# Altium PCB CT310高端控制盒核心板电路V1.3.PcbDoc (part 1 of 10)
Units mil, origin at the board's own origin, x right, y up, seen from the top; angles counter-clockwise.
Board outline 3735.76 x 4625 mil, 2 copper layers (TOP, BOTTOM), stack 10.4 mil thick; 198 components, 362 nets, 1085 pads, 352 vias.
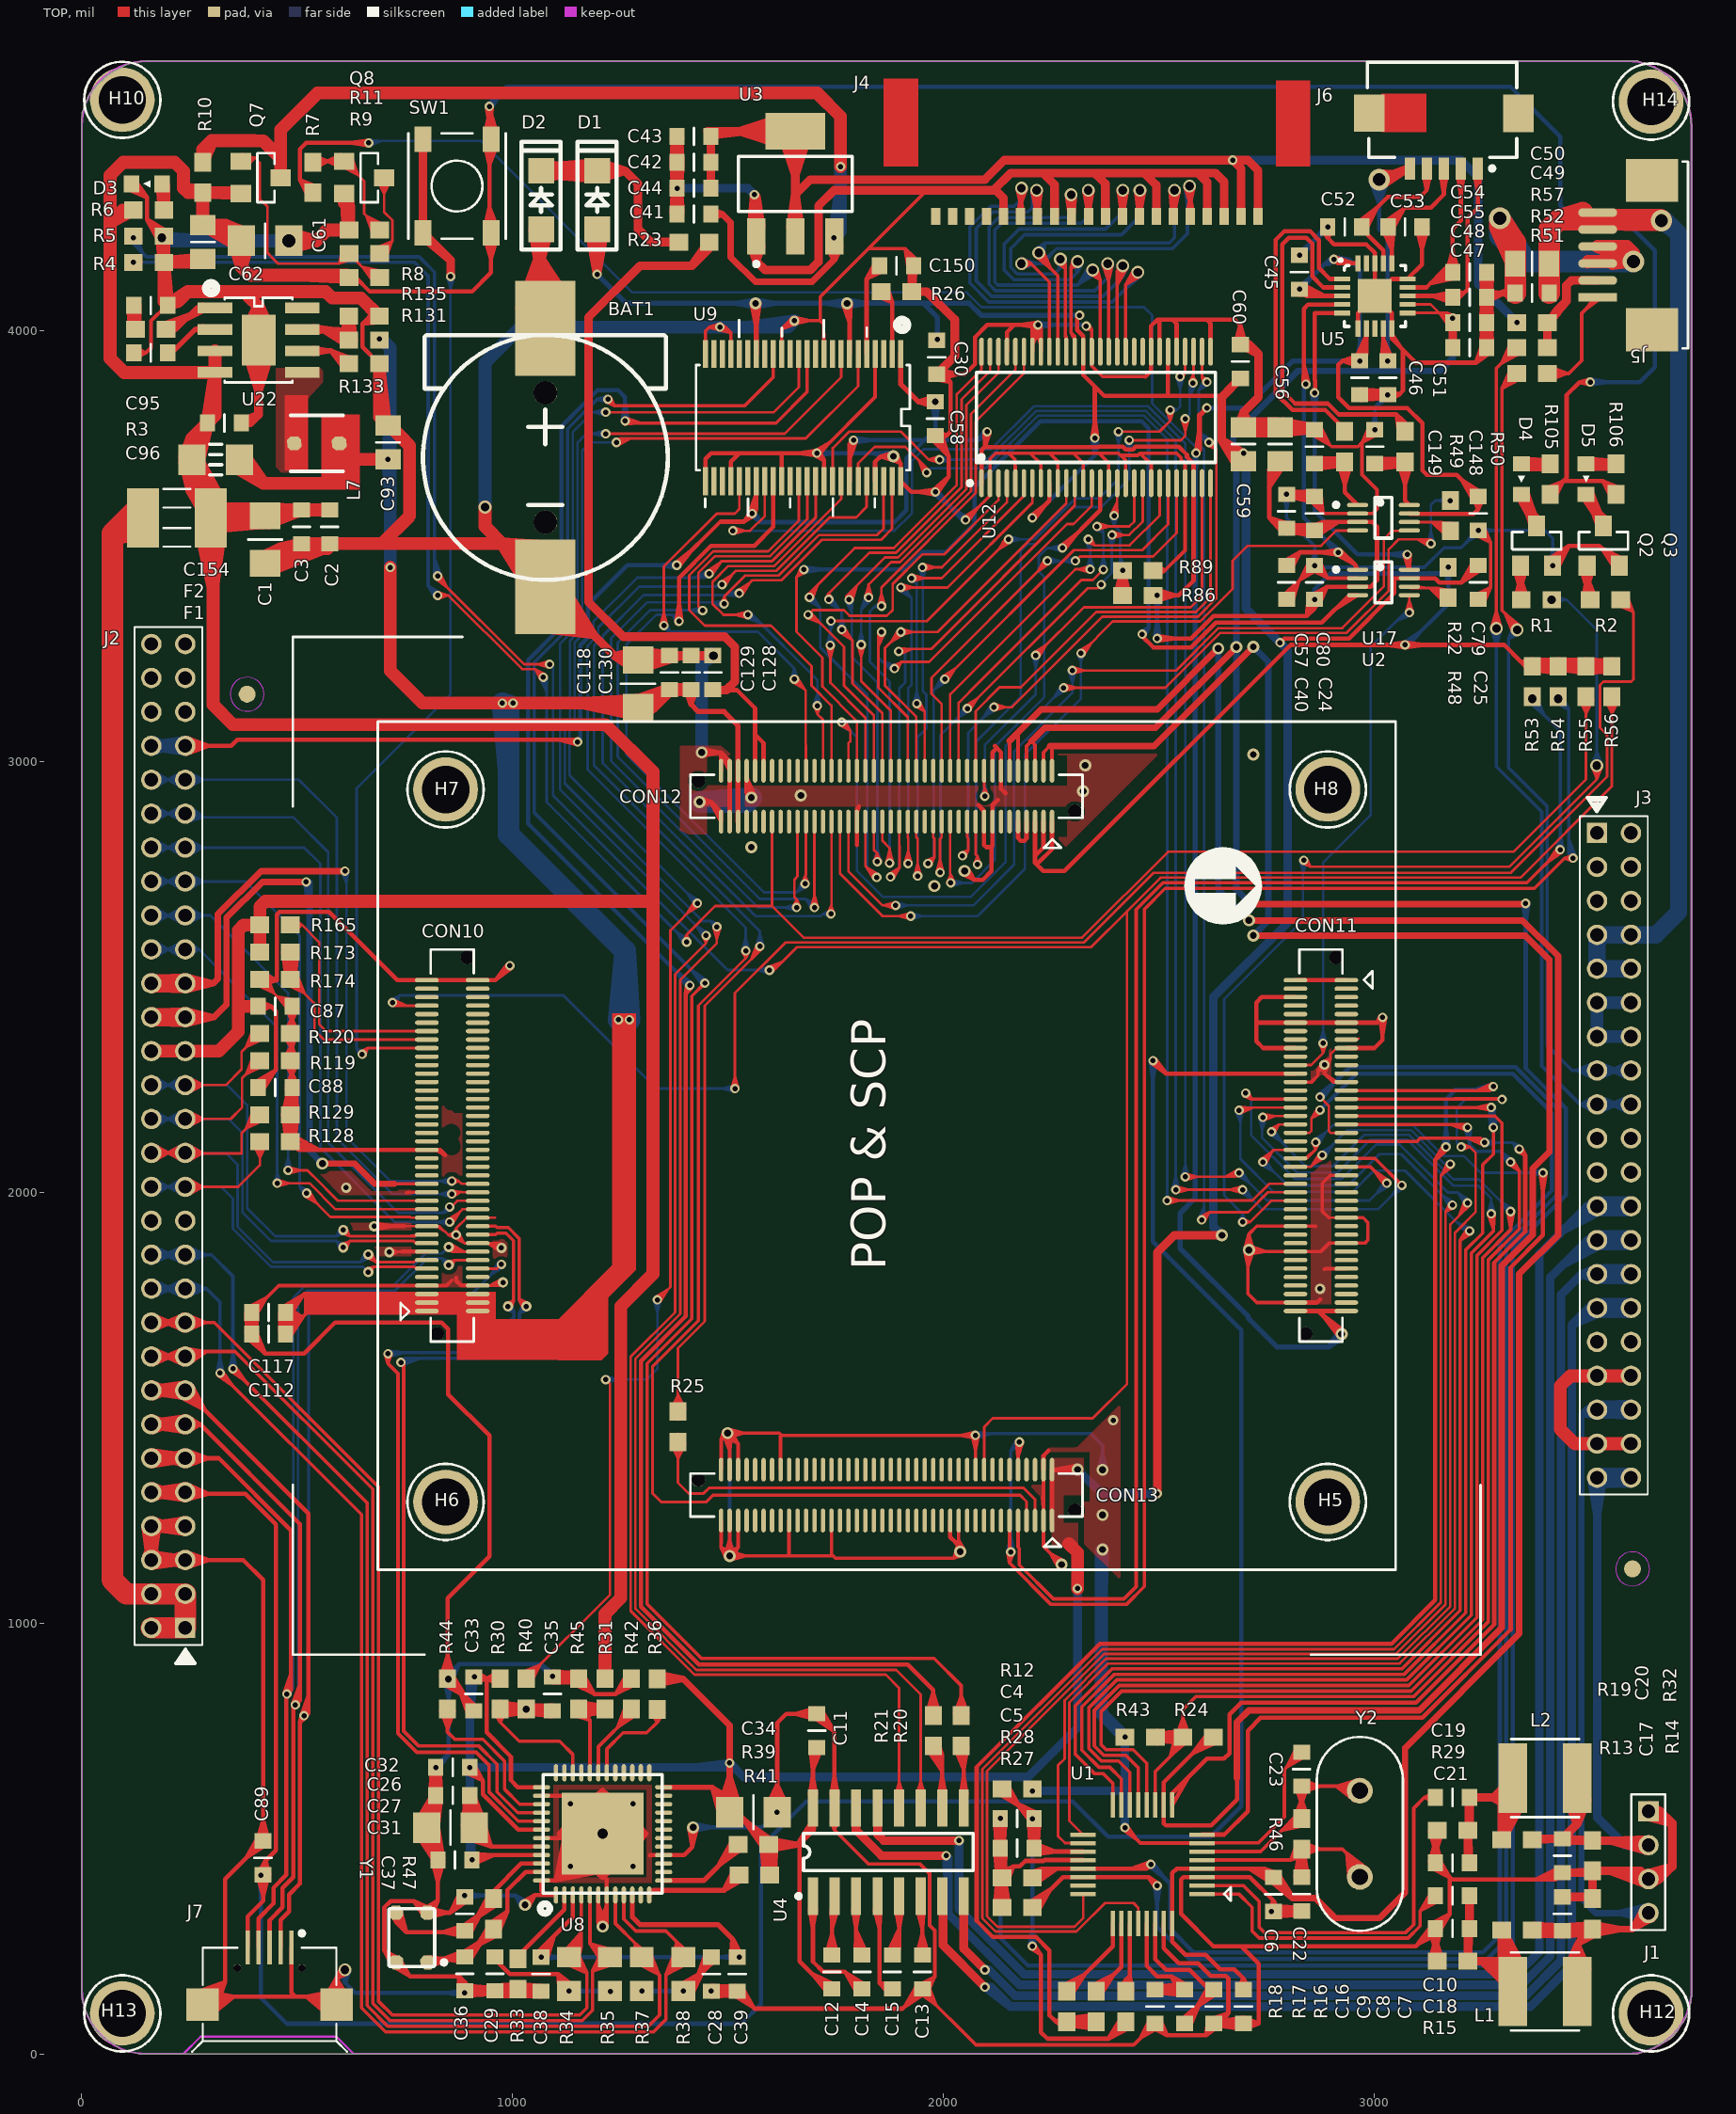
[diagram p0: TOP view]
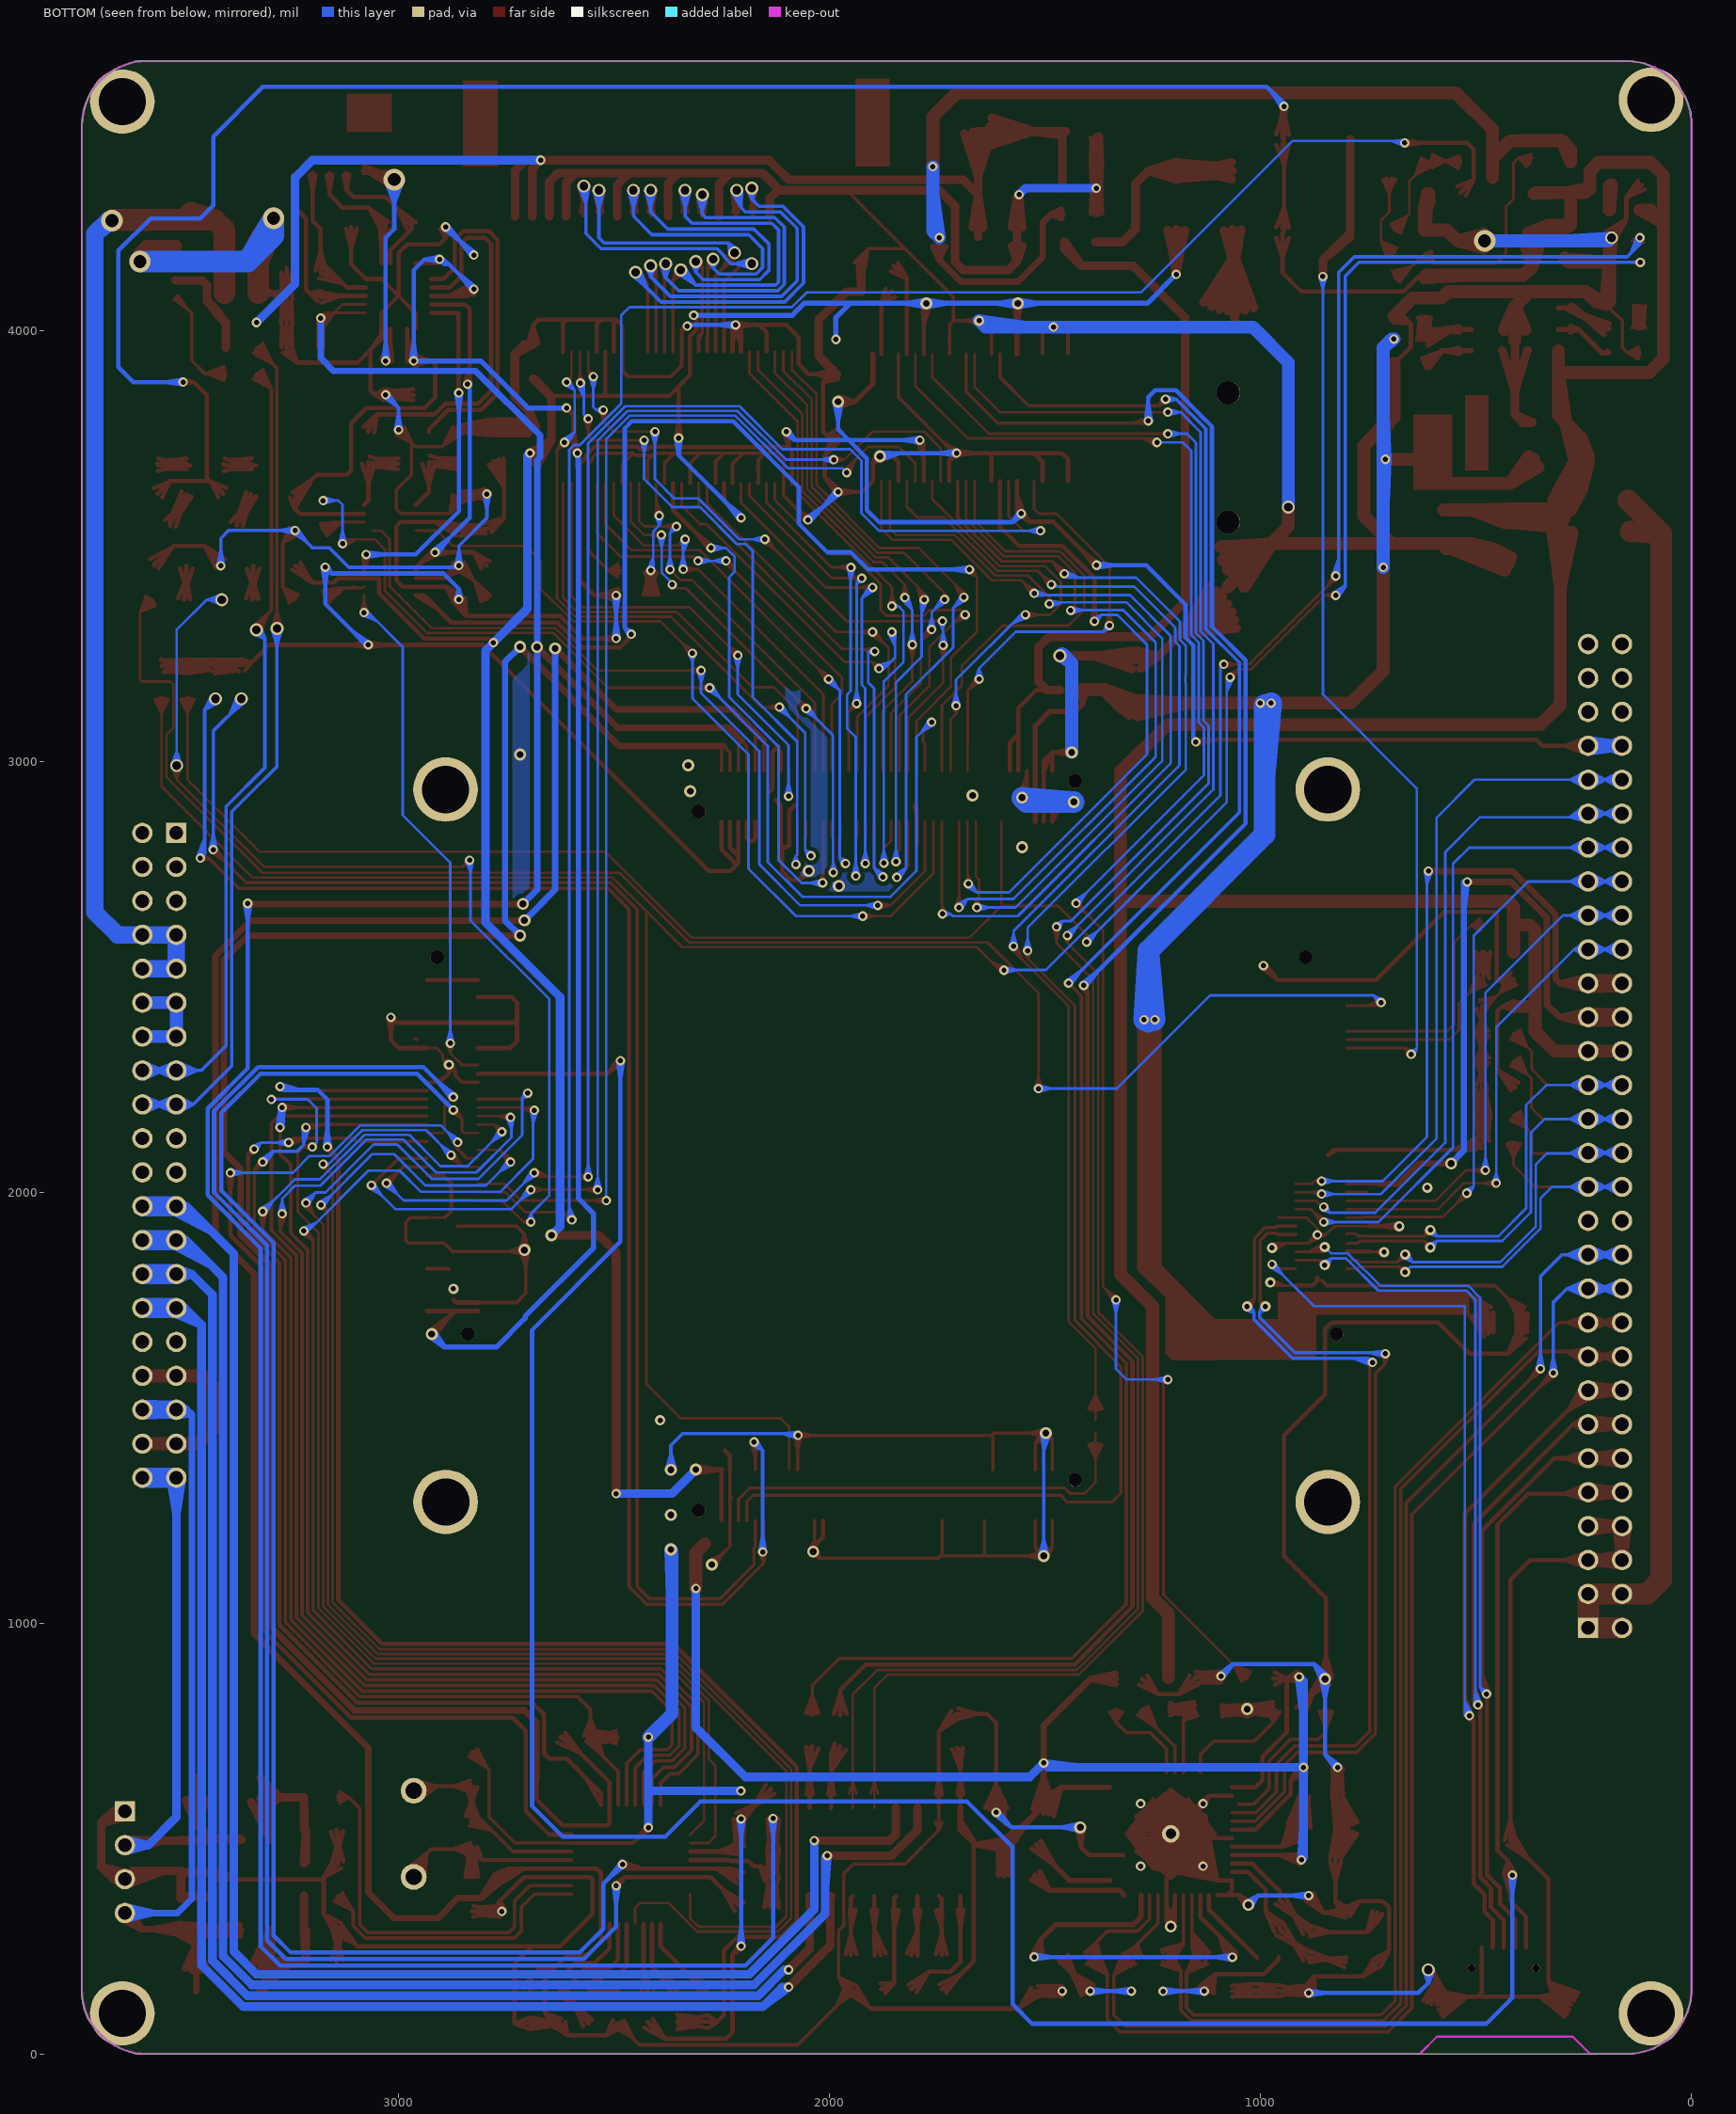
[diagram p1: BOTTOM view, seen from below]
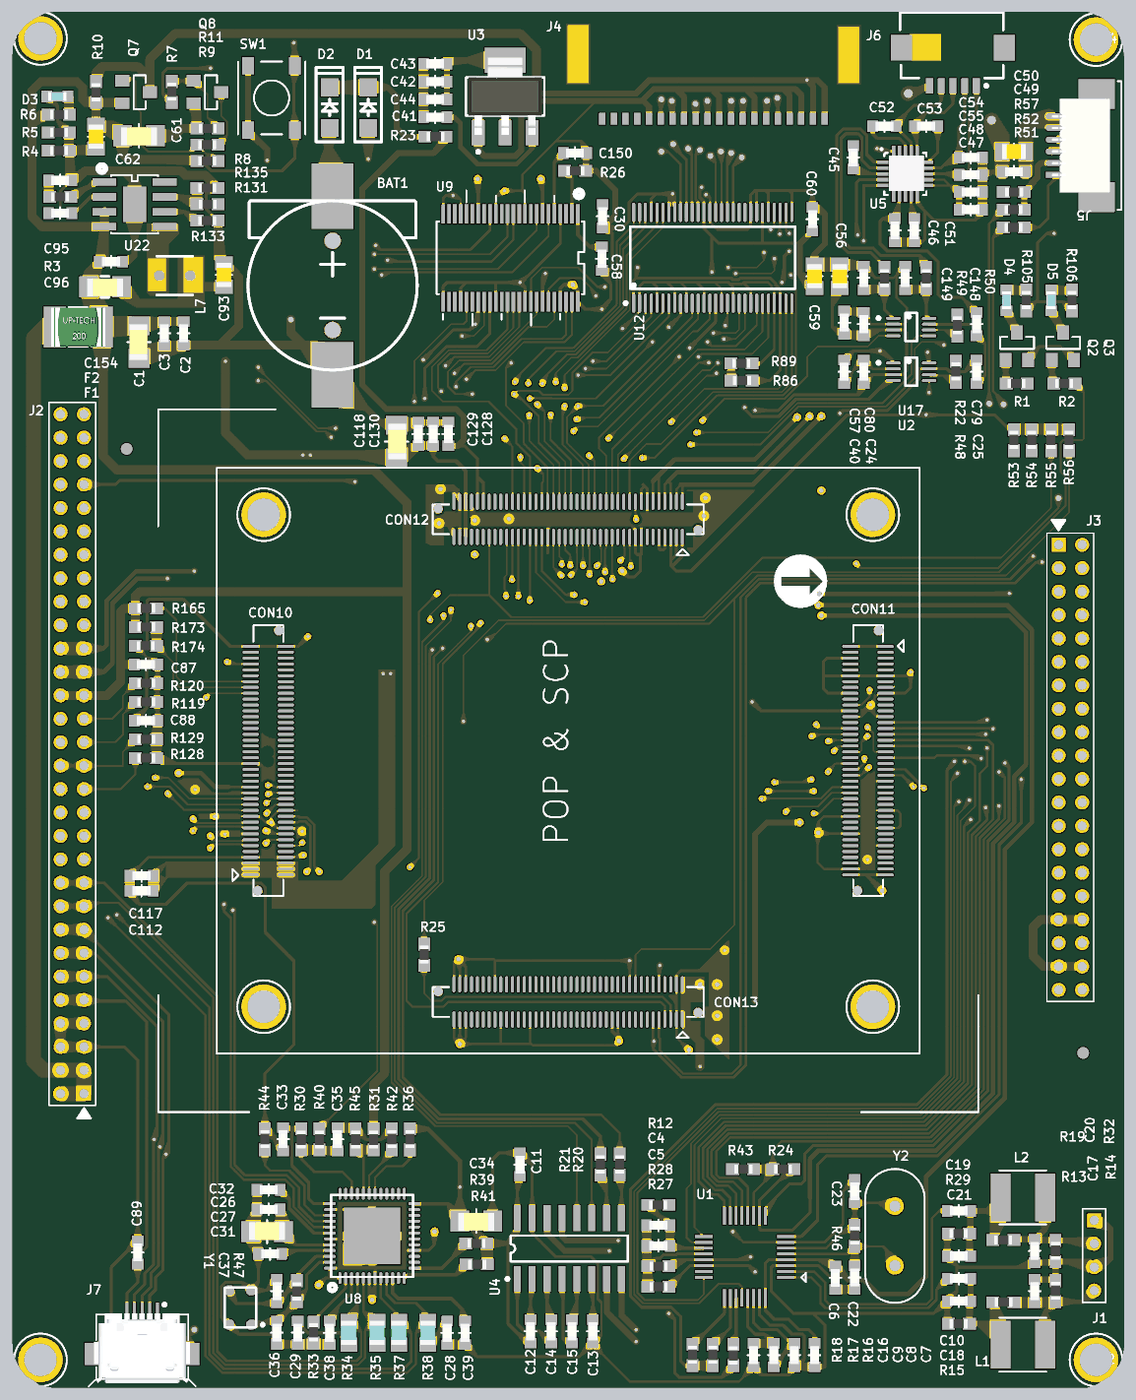
[diagram p11: 3D render of the assembled board from above, using the file's embedded part models]

## Layer stack, top to bottom
TOP: signal copper 1.2
Dielectric: core 8, FR-4, Dk 4.5
BOTTOM: signal copper 1.2

## Board outline
0,4479.24 0,150.76 0.76,125 10.76,95 25.76,65 45.76,40 70.76,25 90.76,10 135.76,0 160.76,0 3590.76,0 3610.76,0 3640.76,10 3665.76,25 3690.76,40 3705.76,60 3720.76,80 3730.76,105 3735.76,135 3735.76,145 3735.76,4475 3730.76,4510 3720.76,4540 3710.76,4560 3695.76,4575 3680.76,4590 3660.76,4605 3635.76,4615 3610.76,4625 3585.76,4625 145.76,4625 110.76,4620 90.76,4610 70.76,4600 50.76,4585 35.76,4570 15.76,4545 0.76,4505 0,4479.24

## Design rules (kind name [scope] priority, off if disabled: settings)
Clearance [All] p1: gap=5
HoleSize [All] p1: absolutevalues=TRUE maxlimit=200 minlimit=1 maxpercent=80.000 minpercent=20.000
MinimumSolderMaskSliver [All] p1: minsoldermaskwidth=8
PlaneConnect [All] p1: planeconnectstyle=Direct reliefexpansion=20 reliefentries=4 reliefconductorwidth=10 reliefairgap=10
PolygonConnect [All] p1: connectstyle=Direct reliefconductorwidth=10 reliefentries=4 polygonreliefangle="90 Angle" airgapwidth=10
RoutingVias [All] p1: holewidth=28 width=50 viastyle="Through Hole" minholewidth=10 minwidth=10 maxholewidth=50 maxwidth=100
SolderMaskExpansion [All] p1: expansion=4
Width [All] p1: maxlimit=100 minlimit=6 preferedwidth=10 minimp=60.000000 maximp=60.000000 favimp=60.000000
25 further rules are at their usual default settings.

## Classes and differential pairs
component class P02-DC_JACK: BAT1 C1 C2 C3 D1 D2 D3 F1 H5 H6 H7 H8 H10 H12 H13 H14 R6 R23 SW1
component class P03-UARTs_KEY: C11 C12 C13 C14 C15 D4 D5 Q2 Q3 R1 R2 R20 R21 R105 R106 U4
component class P04-NET: C26 C27 C28 C29 C30 C31 C32 C33 C34 C35 C36 C37 C38 C39 C58 C150 R25 R26 R30 R31 R33 R34 R35 R36 R37 R38 R39 R40 R41 R42 R44 R45 R47 U8 U9 Y1
component class P07-LCD: C24 C25 C40 C41 C42 C43 C44 C45 C46 C47 C48 C49 C50 C51 C52 C53 C54 C55 C56 C57 C59 C60 C61 C62 C79 C80 C148 C149 J4 J6 Q7 Q8 R7 R8 R9 R10 R11 R22 R48 R49 R50 R51 R52 R57 R86 R89 U2 U3 U5 U12 U17
component class P09-USB_JTAG: C87 C88 C89 J7 R119 R120 R128 R129
component class "P11-CAMERA AVIN": C4 C5 C6 C7 C8 C9 C10 C16 C17 C18 C19 C20 C21 C22 C23 J1 L1 L2 R12 R13 R14 R15 R16 R17 R18 R19 R24 R27 R28 R29 R32 R43 R46 U1 Y2
component class P15-EXP_IO: C93 C95 C96 C112 C117 C118 C128 C129 C130 C154 CON10 CON11 con12 CON13 F2 L7 R3 R4 R5 R53 R54 R55 R56 R131 R133 R135 R165 R173 R174 U22
net class LCD_VD[0..23]: LCD_VD0 LCD_VD1 LCD_VD2 LCD_VD3 LCD_VD4 LCD_VD5 LCD_VD6 LCD_VD7 LCD_VD8 LCD_VD9 LCD_VD10 LCD_VD11 LCD_VD12 LCD_VD13 LCD_VD14 LCD_VD15 LCD_VD16 LCD_VD17 LCD_VD18 LCD_VD19 LCD_VD20 LCD_VD21 LCD_VD22 LCD_VD23
net class XM0ADDR[0..7]: XM0ADDR0 XM0ADDR1 XM0ADDR2 XM0ADDR3 XM0ADDR4 XM0ADDR5 XM0ADDR6 XM0ADDR7
net class XM0DATA[0..15]: XM0DATA0 XM0DATA1 XM0DATA2 XM0DATA3 XM0DATA4 XM0DATA5 XM0DATA6 XM0DATA7 XM0DATA8 XM0DATA9 XM0DATA10 XM0DATA11 XM0DATA12 XM0DATA13 XM0DATA14 XM0DATA15
component class P16-Connector: J2 J3

## Components (designator, comment, footprint, x,y, rotation, side; value= is the part's Value field where it differs from the comment)
BAT1 "CR1220" BAT1 1075.76,3705 r90 top
C1 "22uF/10V" C1206-S 425.19,3514.53 r270 top
C2 "0.1uF/10V" C0603-S 575.19,3544.06 r270 top
C3 "10uF/10V" C0603-S 510.19,3544.06 r270 top
C4 "2.2uF" C0603-S 2170.76,546.25 r180 top
C5 "0.1uF" C0603-S 2170.76,477.5 r180 top
C6 "2.2uF" C0603-S 2765.76,370 r90 top
C7 "0.1uF" C0603-S 2695.76,110 r90 top
C8 "1uF" C0603-S 2627.43,110 r90 top
C9 "1uF" C0603-S 2559.09,110 r270 top
C10 "0.1uF" C0603-S 3180.76,367 r180 top
C11 "0.1uF" C0603-S 1705.76,750 r90 top
C12 "0.1uF" C0603-S 1740.76,190 r90 top
C13 "0.1uF" C0603-S 1950.76,190 r270 top
C14 "0.1uF" C0603-S 1810.76,190 r270 top
C15 "0.1uF" C0603-S 1880.76,190 r90 top
C16 "1uF" C0603-S 2490.76,110 r90 top
C17 "0.1uF/NC" C0603-S 3435.76,325 r90 top
C18 "0.1uF/NC" C0603-S 3180.76,291 r180 top
C19 "0.1uF" C0603-S 3180.76,595 r180 top
C20 "0.1uF/NC" C0603-S 3435.76,460 r270 top
C21 "0.1uF/NC" C0603-S 3180.76,443 r180 top
C22 "22pF" C0603-s 2830.76,370.63 r270 top
C23 "22pF" C0603-s 2830.76,660.63 r270 top
C24 "0.1uF" C0603-S 2860.76,3415 r90 top
C25 "0.1uF" C0603-S 3240.76,3415 r270 top
C26 "0.1uF" C0603-S 860.76,600 r180 top
C27 "22uF" C1206-S 855.76,525 r180 top
C28 "0.1uF" C0603-S 1460.76,185 r90 top
C29 "0.1uF" C0603-S 958.61,185.57 r90 top
C30 "0.1uF" C0603-S 1983.61,3937.64 r270 top
C31 "0.1uF" C0603-S 865.76,450 r180 top
C32 "0.1uF" C0603-S 860.76,665 r180 top
C33 "0.1uF" C0603-S 909.51,835.57 r270 top
C34 "22uF" C1206-S 1558.61,560.57 r0 top
C35 "0.1uF" C0603-S 1092.19,835.57 r270 top
C36 "22pF" C0603-S 888.61,185.57 r270 top
C37 "22pF" C0603-S 888.61,325 r90 top
C38 "0.1uF" C0603-S 1065.76,185 r270 top
C39 "0.1uF" C0603-S 1520.76,185 r270 top
C40 "0.1uF/NC" C0603-S 2795.76,3415 r270 top
C41 "10uF" C0603-s 1420.76,4270 r0 top
C42 "10uF" C0603-s 1420.76,4390 r0 top
C43 "0.1uF" C0603-s 1420.76,4450 r0 top
C44 "0.1uF" C0603-s 1420.76,4330 r0 top
C45 "0.1uF" C0603-S 2825.76,4135 r270 top
C46 "0.1uF" C0603-S 2965.76,3890 r90 top
C47 "0.1uF" C0603-S 3220.76,3960 r180 top
C48 "0.1uF" C0603-S 3220.76,4018.33 r180 top
C49 "0.1uF" C0603-s 3365.76,4086.67 r0 top
C50 "22uF" C0805-s 3365.76,4154.84 r0 top
C51 "1nF" C0603-S 3030.76,3890 r90 top
C52 "1nF" C0603-S 2930.76,4240 r0 top
C53 "1nF" C0603-S 3070.76,4240 r180 top
C54 "1nF" C0603-S 3220.76,4135 r180 top
C55 "1nF" C0603-S 3220.76,4076.67 r180 top
C56 "10uF" C0805-S 2780.76,3735.91 r90 top
C57 "0.1uF" C0603-S 2795.76,3580 r90 top
C58 "0.1uF" C0603-S 1980.76,3795 r270 top
C59 "10uF" C0805-S 2695.76,3735.91 r90 top
C60 "0.1uF" C0603-S 2688.61,3927.64 r90 top
C61 "47uF/16v" C1206-S 425.19,4207.85 r0 top
C62 "10uF" C0805-S 280.76,4205 r270 top
C79 "0.1uF" C0603-S 3240.76,3575 r270 top
C80 "0.1uF" C0603-S 2860.76,3575 r90 top
C87 "1uF/10V" C0603-S 448.61,2431.21 r0 top
C88 "1uF/10V" C0603-S 448.61,2242.43 r0 top
C89 "4.7uF" C0603-S 420.76,455 r270 top
C93 "22uF" C0805-S 710.76,3740 r90 top
C95 "560pF" C0603-S 160.19,4057.85 r0 top
C96 "10nF" C0603-S 160.19,3947.85 r180 top
C112 "0.1uF/10V" C0603-S 433.61,1670.57 r180 top
C117 "0.1uF/10V" C0603-S 433.61,1720.57 r180 top
C118 "22uF/10V" C1206-S 1290.76,3180 r90 top
C128 "1uF/10V" C0603-S 1464.61,3205.89 r90 top
C129 "0.1uF/10V" C0603-S 1414.11,3205.89 r90 top
C130 "0.1uF/10V" C0603-S 1363.61,3205.89 r90 top
C148 "0.1uF/NC" C0603-S 3000.76,3730 r90 top
C149 "0.1uF/NC" C0603-S 2860.76,3730 r90 top
C150 "0.1uF/NC" C0603-S 1890.76,4150 r0 top
C154 "10uF" C0603-S 330.76,3785 r0 top
CON10 "CON40X2_0_8MM" CON2X40-0_5MM-BB 859.72,2107.89 r90 top
CON11 "CON40X2_0_8MM" CON2X40-0_5MM-BB 2875.46,2107.89 r270 top
CON12 "CON40X2_0_8MM" CON2X40-0_5MM-BB 1867.59,2918.92 r180 top
CON13 "CON40X2_0_8MM" CON2X40-0_5MM-BB 1867.59,1296.87 r180 top
D1 "IN4148" D1206 1195.76,4305 r270 top
D2 "IN4148" D1206 1065.76,4305 r270 top
D3 "LED-Red (SMD 2012)" LED0603 150.76,4340 r180 top
D4 "LED-Red (SMD 2012)" LED0603 3340.76,3655 r270 top
D5 "LED-Red (SMD 2012)" LED0603 3490.76,3655 r270 top
F1 "500ma" F1812 220.76,3565 r0 top
F2 "0R/NC" F1206 310.76,3700 r0 top
H5 "TP_P0_0.8_D0" HOLE2_7 2891.52,1280.91 r0 top
H6 "TP_P0_0.8_D0" HOLE2_7 844.26,1280.91 r0 top
H7 "TP_P0_0.8_D0" HOLE2_7 844.26,2934.45 r0 top
H8 "TP_P0_0.8_D0" HOLE2_7 2891.62,2934.45 r0 top
H10 "TP_P0_0.8_D0" HOLE2_7 93.95,4535 r0 top
H12 "TP_P0_0.8_D0" HOLE2_7 3641.81,93.95 r0 top
H13 "TP_P0_0.8_D0" HOLE2_7 93.95,93.95 r0 top
H14 "TP_P0_0.8_D0" HOLE2_7 3641.81,4531.05 r0 top
J1 "HEADER1X4" HD1X4-2.00 3635.76,445 r270 top
J2 "HEADER 30X2" HD2X30-2.00 200.76,2130.37 r90 top
J3 "HEADER 2X20" HD2X20-2.00 3555.76,2085.42 r270 top
J4 "DF19G-20P-1H" DF19G-20P-1H 2355.76,4265 r180 top
J5 "ZH1X6WT-1.5" sm06b-srss-tb 3580.76,4175 r90 top
J6 "HEADER1X5" FFC/SM1.0-5 3160.76,4440 r180 top
J7 "ZX62RD-AB-5P8" MICRO-USB 435.76,180.55 r180 top
L1 "3.3uH/NC" L4X4-S 3395.76,145 r180 top
L2 "3.3uH/NC" L4X4-S 3395.76,640 r180 top
L7 "2.2uH" L3X3MM 545.19,3737.85 r0 top
Q2 "L9014" SOT-23 3375.76,3500 r180 top
Q3 "L9014" SOT-23 3530.76,3500 r180 top
Q7 "AO3415A" SOT-23 415.44,4355 r90 top
Q8 "8050" SOT-23 655.44,4355 r90 top
R1 "1K" R0603-S 3375.76,3375 r0 top
R2 "1K" R0603-S 3535.76,3375 r0 top
R3 "33K" R0603-S 160.19,4002.85 r0 top
R4 "10K" R0603-S 155.19,4157.85 r180 top
R5 "10K" R0603-S 155.19,4218.57 r180 top
R6 "1K" R0603-S 155.19,4279.28 r180 top
R7 "1K/NC" R0603-S 535.76,4355 r270 top
R8 "100K" R0603-S 655.44,4122.85 r0 top
R9 "22R/NC" R0603-S 655.44,4177.85 r0 top
R10 "0R" R0603-S 280.76,4355 r90 top
R11 "10K/NC" R0603-S 655.44,4232.85 r180 top
R12 "0R" R0603-S 2170.76,615 r0 top
R13 "37.4R" R0603-S 3330.76,287.6 r180 top
R14 "37.4R" R0603-S 3505.76,325 r270 top
R15 "75R/NC" R0603-S 3180.76,215 r0 top
R16 "10k" R0603-S 2422.43,110 r90 top
R17 "0R/NC" R0603-S 2354.09,110 r270 top
R18 "0R" R0603-S 2285.76,110 r270 top
R19 "37.4R" R0603-S 3330.76,497.4 r0 top
R20 "0R" R0603-S 2040.76,750 r270 top
R21 "0R" R0603-S 1975.76,750 r270 top
R22 "0R" R0603-S 3175.76,3570 r270 top
R23 "0R" R0603-S 1420.76,4205 r180 top
R24 "10k" R0603-S 2590.76,735 r0 top
R25 "0R" R0603-S 1383.61,1455.57 r270 top
R26 "10K" R0603-S 1890.76,4090 r180 top
R27 "2.2k/NC" R0603-S 2170.76,340 r180 top
R28 "2.2k/NC" R0603-S 2170.76,408.75 r180 top
R29 "75R/NC" R0603-S 3180.76,519 r0 top
R30 "10K/NC" R0603-S 970.4,835.57 r90 top
R31 "15K" R0603-S 1213.97,835.57 r90 top
R32 "37.4R" R0603-S 3505.76,460 r270 top
R33 "10K" R0603-S 1012.19,185.57 r270 top
R34 "49.9R" R0805-S 1130.76,185 r270 top
R35 "49.9R" R0805-S 1225.76,185 r270 top
R36 "10K" R0603-S 1335.76,835 r270 top
R37 "49.9R" R0805-S 1299.09,185 r270 top
R38 "49.9R" R0805-S 1395.76,185 r270 top
R39 "10K" R0603-S 1558.61,485.57 r180 top
R40 "0R" R0603-S 1031.29,835.57 r90 top
R41 "10K" R0603-S 1560.76,415 r180 top
R42 "10K" R0603-S 1274.87,835.57 r270 top
R43 "NC" R0603-S 2455.76,735 r180 top
R44 "10K" R0603-S 848.61,835.57 r270 top
R45 "47K" R0603-S 1153.08,835.57 r90 top
R46 "1M" R0603-S 2830.76,510.63 r270 top
R47 "1M" R0603-S 955.76,325 r90 top
R48 "10K" R0603-S 3170.76,3415 r270 top
R49 "0R" R0603-S 2930.76,3730 r90 top
R50 "0R" R0603-S 3070.76,3730 r90 top
R51 "NC" R0603-S 3365.76,3900 r0 top
R52 "NC" R0603-S 3365.76,3960 r0 top
R53 "0R/NC" R0603-S 3365.76,3185 r270 top
R54 "0R" R0603-S 3425.76,3185 r270 top
R55 "0R/NC" R0603-S 3490.76,3185 r270 top
R56 "0R" R0603-S 3550.76,3185 r270 top
R57 "0R" R0603-S 3365.76,4018.33 r180 top
R86 "10K" R0603-S 2450.76,3385 r180 top
R89 "NC" R0603-S 2450.76,3442.85 r0 top
R105 "1K" R0603-S 3407.43,3655 r270 top
R106 "1K" R0603-S 3560.76,3655 r270 top
R119 "15K" R0603-S 448.61,2305.36 r180 top
R120 "15K" R0603-S 448.61,2368.29 r180 top
R128 "15K" R0603-S 448.61,2116.57 r180 top
R129 "15K" R0603-S 448.61,2179.5 r180 top
R131 "38K" R0603-S 655.19,3977.85 r180 top
R133 "510K  1%" R0603-S 655.19,3922.85 r0 top
R135 "10K" R0603-S 655.19,4032.85 r0 top
R165 "800K" R0603-S 448.61,2620 r180 top
R173 "800K/NC" R0603-S 448.61,2557.07 r180 top
R174 "0R" R0603-S 448.61,2494.14 r0 top
SW1 "RESET" SW4-SMD 870.76,4335 r90 top
U1 "TVP5150AM1PBSR" PFFQ32 2480.76,440 r90 top
U2 "TXS0102DCU" tssop8 3020.76,3415 r270 top
U3 "REG1117-3.3V" SOT-223 1655.76,4340 r0 top
U4 "MAX3232CSE" SO-16 1870.19,467.85 r0 top
U5 "TSC2004IRTJ" QFN20 3000.76,4080 r0 top
U8 "DM9621ANP" QFN48-050-0707LH 1208.61,510.57 r90 top
U9 "U-74ALVC164245DGG" TSSOP_48 1673.61,3797.64 r180 top
U12 "GM8285C" TSSOP56 2353.61,3797.96 r0 top
U17 "TXS0102DCU" TSSOP8 3020.76,3565 r270 top
U22 "RT8065ZSP" SOIC8-LH 410.19,3977.85 r270 top
Y1 "25MHz" X4-2_5X3_2 765.76,270 r180 top
Y2 "14.31818MHz" CRYSTAL_D200 2965.76,510.37 r270 top

## Footprints (in the part's own frame and the unit in brackets; to place one, negate y for a bottom-side part, rotate by r counter-clockwise, add the part's x,y. Pads: shape width x height; smd on the part's side, far side on the other; paste and mask are expansions set on the pad)
BAT1 [mil] "BAT1"
  rect 220x140 smd: 1(300,0) 2(-300,0)
  round 55 / inner round 60 / far side round 55 hole 55: " "(-150,0) " "(150,0)
  silkscreen extent -284,-284 284,284
C0603-S [mm]
  rect 0.9x1 smd: 1(-1,0) 2(1,0)
  silkscreen extent 0,-0.5 0,0.5, body extent -0.76,-0.39 0.76,0.38, height 0.46
C0603-s [mm]
  rect 0.9x1 smd: 1(-1,0) 2(1,0)
  silkscreen extent 0,-0.5 0,0.5, body extent -0.76,-0.39 0.76,0.38, height 0.46
C0805-s [mm]
  rect 1.2x1.5 smd: 1(-1,0) 2(1,0)
  silkscreen extent 0,-0.69 0,0.69, body extent -1.02,-0.64 1.02,0.64, height 0.61
C0805-S [mm]
  rect 1.2x1.5 smd: 1(-1,0) 2(1,0)
  silkscreen extent 0,-0.69 0,0.69, body extent -1.02,-0.64 1.02,0.64, height 0.61
C1206-S [mm]
  rect 1.6x1.8 smd: 1(-1.4,0) 2(1.4,0)
  silkscreen extent 0,-1 0,1, body extent -1.52,-0.82 1.52,0.71, height 0.61
CON2X40-0_5MM-BB [mil] "CON2X40-0_5MM-BB"
  oval 10x55 smd: 1(-383.86,59.06) 2(-383.86,-59.06) 3(-364.17,59.06) 4(-364.17,-59.06) 5(-344.49,59.06) 6(-344.49,-59.06) 7(-324.8,59.06) 8(-324.8,-59.06) 9(-305.12,59.06) 10(-305.12,-59.06) 11(-285.43,59.06) 12(-285.43,-59.06) 13(-265.75,59.06) 14(-265.75,-59.06) 15(-246.06,59.06) 16(-246.06,-59.06) 17(-226.38,59.06) 18(-226.38,-59.06) 19(-206.69,59.06) 20(-206.69,-59.06) 21(-187.01,59.06) 22(-187.01,-59.06) 23(-167.32,59.06) 24(-167.32,-59.06) 25(-147.64,59.06) 26(-147.64,-59.06) 27(-127.95,59.06) 28(-127.95,-59.06) 29(-108.27,59.06) 30(-108.27,-59.06) 31(-88.58,59.06) 32(-88.58,-59.06) 33(-68.9,59.06) 34(-68.9,-59.06) 35(-49.21,59.06) 36(-49.21,-59.06) 37(-29.53,59.06) 38(-29.53,-59.06) 39(-9.84,59.06) 40(-9.84,-59.06) 41(9.84,59.06) 42(9.84,-59.06) 43(29.53,59.06) 44(29.53,-59.06) 45(49.21,59.06) 46(49.21,-59.06) 47(68.9,59.06) 48(68.9,-59.06) 49(88.58,59.06) 50(88.58,-59.06) 51(108.27,59.06) 52(108.27,-59.06) 53(127.95,59.06) 54(127.95,-59.06) 55(147.64,59.06) 56(147.64,-59.06) 57(167.32,59.06) 58(167.32,-59.06) 59(187.01,59.06) 60(187.01,-59.06) 61(206.69,59.06) 62(206.69,-59.06) 63(226.38,59.06) 64(226.38,-59.06) 65(246.06,59.06) 66(246.06,-59.06) 67(265.75,59.06) 68(265.75,-59.06) 69(285.43,59.06) 70(285.43,-59.06) 71(305.12,59.06) 72(305.12,-59.06) 73(324.8,59.06) 74(324.8,-59.06) 75(344.49,59.06) 76(344.49,-59.06) 77(364.17,59.06) 78(364.17,-59.06) 79(383.86,59.06) 80(383.86,-59.06)
  round 32 / inner round 60 / far side round 32 hole 32: " "(-437.01,35.43) " "(437.01,-35.43)
  silkscreen extent -455,-50 455,120
CRYSTAL_D200 [mil] "CRYSTAL_D200"
  round 60 hole 38: 1(-100.26,0) 2(99.74,0)
  silkscreen extent -225,-100 225,100
D1206 [mil] "D1206"
  rect 60x60 smd: 1(70.49,0) 2(-65.49,0)
  silkscreen extent -132,-45 118,45
DF19G-20P-1H [mm]
  rect 0.55x1 smd: 1(-9.5,0) 2(-8.5,0) 3(-7.5,0) 4(-6.5,0) 5(-5.5,0) 6(-4.5,0) 7(-3.5,0) 8(-2.5,0) 9(-1.5,0) 10(-0.5,0) 11(0.5,0) 12(1.5,0) 13(2.5,0) 14(3.5,0) 15(4.5,0) 16(5.5,0) 17(6.5,0) 18(7.5,0) 19(8.5,0) 20(9.5,0)
  TOP region: 11.171,-5.508 12.271,-5.508 12.271,-3.008 11.171,-3.008
  TOP region: -12.429,-5.508 -11.329,-5.508 -11.329,-3.008 -12.429,-3.008
F1206 [mm]
  rect 1.6x1.8 smd: 1(-1.4,0) 2(1.4,0)
  silkscreen extent -0.35,-0.9 0.35,0.9, body extent -1.52,-0.82 1.52,0.71, height 0.61
F1812 [mm]
  rect 1.9x3.5 smd: 1(-2,0) 2(2,0)
  silkscreen extent -0.8,-1.7 0.8,1.7, body extent -2.29,-1.65 2.31,1.65, height 0.69
FFC/SM1.0-5 [mm] "Connector; FH12 Series; 9 Position; 1.0mm Spaced Bottom Standard Contact"
  rect 1.8x2.2 smd: 0(-4.4,-1.62) 0(4.4,-1.63)
  rect 0.6x1.3 smd: 1(-2,1.63) 2(-1,1.63) 3(0,1.63) 4(1,1.63) 5(2,1.63)
  silkscreen extent -4.3,-4.63 4.51,1.75
HD1X4-2.00 [mm]
  rect 1.2x1.2 hole 0.8: 1(-3,0)
  round 1.2 hole 0.8: 2(-1,0) 3(1,0) 4(3,0)
  silkscreen extent -4,-1.01 4,0.99
HD2X20-2.00 [mm]
  rect 1.2x1.2 hole 0.8: 1(-19,-1)
  round 1.2 hole 0.8: 2(-19,1) 3(-17,-1) 4(-17,1) 5(-15,-1) 6(-15,1) 7(-13,-1) 8(-13,1) 9(-11,-1) 10(-11,1) 11(-9,-1) 12(-9,1) 13(-7,-1) 14(-7,1) 15(-5,-1) 16(-5,1) 17(-3,-1) 18(-3,1) 19(-1,-1) 20(-1,1) 21(1,-1) 22(1,1) 23(3,-1) 24(3,1) 25(5,-1) 26(5,1) 27(7,-1) 28(7,1) 29(9,-1) 30(9,1) 31(11,-1) 32(11,1) 33(13,-1) 34(13,1) 35(15,-1) 36(15,1) 37(17,-1) 38(17,1) 39(19,-1) 40(19,1)
  silkscreen extent -21.09,-2.01 20,1.99
HD2X30-2.00 [mm]
  rect 1.2x1.2 hole 0.8: 1(-29,-1)
  round 1.2 hole 0.8: 2(-29,1) 3(-27,-1) 4(-27,1) 5(-25,-1) 6(-25,1) 7(-23,-1) 8(-23,1) 9(-21,-1) 10(-21,1) 11(-19,-1) 12(-19,1) 13(-17,-1) 14(-17,1) 15(-15,-1) 16(-15,1) 17(-13,-1) 18(-13,1) 19(-11,-1) 20(-11,1) 21(-9,-1) 22(-9,1) 23(-7,-1) 24(-7,1) 25(-5,-1) 26(-5,1) 27(-3,-1) 28(-3,1) 29(-1,-1) 30(-1,1) 31(1,-1) 32(1,1) 33(3,-1) 34(3,1) 35(5,-1) 36(5,1) 37(7,-1) 38(7,1) 39(9,-1) 40(9,1) 41(11,-1) 42(11,1) 43(13,-1) 44(13,1) 45(15,-1) 46(15,1) 47(17,-1) 48(17,1) 49(19,-1) 50(19,1) 51(21,-1) 52(21,1) 53(23,-1) 54(23,1) 55(25,-1) 56(25,1) 57(27,-1) 58(27,1) 59(29,-1) 60(29,1)
  silkscreen extent -31.09,-2.01 30,1.99
HOLE2_7 [mil] "HOLE2_7"
  round 150 / inner round 60 / far side round 150 hole 110: 1(0,0)
  silkscreen extent -88,-88 88,88
L3X3MM [mm] "L3X3MM"
  oct 0.846x0.846 smd rot 93: 1(-1.325,0) 2(1.325,0)
  silkscreen extent -1.55,-1.65 1.55,1.65
L4X4-S [mil] "L4X4-S"
  rect 67x161 smd: 1(-74.8,0) 2(74.8,0)
  silkscreen extent -79,-91 79,91
LED0603 [mm]
  rect 0.9x1 smd: 1(-0.9,0) 2(0.9,0)
  silkscreen extent -0.2,-0.2 0.2,0.2, body extent -0.76,-0.38 0.76,0.38, height 0.76
MICRO-USB [mm]
  rect 0.25x2 smd: 1(1.3,-1.679) 2(0.65,-1.679) 3(0,-1.679) 4(-0.65,-1.679) 5(-1.3,-1.679)
  rect 1.9x1.9 smd: 6(-3.95,1.679) 7(3.95,1.679)
  round 0.457 hole 0.457 unplated: ""(-1.9,-0.471) ""(1.9,-0.471)
  silkscreen extent -4.57,-2.64 4.57,4.46, body extent -4.1,-1.75 4.1,4.18, height 2.77
PFFQ32 [mm] "PFFQ32"
  rect 0.25x1.5 smd: 1(-1.75,-3.012) 2(-1.25,-3.012) 3(-0.75,-3.012) 4(-0.25,-3.012) 5(0.25,-3.012) 6(0.75,-3.012) 7(1.25,-3.012) 8(1.75,-3.012) 17(1.75,3.988) 18(1.25,3.988) 19(0.75,3.988) 20(0.25,3.988) 21(-0.25,3.988) 22(-0.75,3.988) 23(-1.25,3.988) 24(-1.75,3.988)
  rect 1.5x0.25 smd: 9(3.5,-1.262) 10(3.5,-0.762) 11(3.5,-0.262) 12(3.5,0.238) 13(3.5,0.738) 14(3.5,1.238) 15(3.5,1.738) 16(3.5,2.238) 25(-3.5,2.238) 26(-3.5,1.738) 27(-3.5,1.238) 28(-3.5,0.738) 29(-3.5,0.238) 30(-3.5,-0.262) 31(-3.5,-0.762) 32(-3.5,-1.262)
  silkscreen extent -2.15,-4.71 -1.35,-4.31
QFN20 [mm]
  rect 0.95x0.3 smd: 1(-1.925,1) 2(-1.925,0.5) 3(-1.925,0) 4(-1.925,-0.5) 5(-1.925,-1) 11(1.925,-1) 12(1.925,-0.5) 13(1.925,0) 14(1.925,0.5) 15(1.925,1)
  rect 0.3x0.95 smd: 6(-1,-1.925) 7(-0.5,-1.925) 8(0,-1.925) 9(0.5,-1.925) 10(1,-1.925) 16(1,1.925) 17(0.5,1.925) 18(0,1.925) 19(-0.5,1.925) 20(-1,1.925)
  rect 2x2 smd: 21(0,0)
  silkscreen extent -2.08,-1.8 1.8,2.16, body extent -1.4,-1.45 1.6,1.55, height 0.62
QFN48-050-0707LH [mil] "QFN48-050-0707LH"
  oval 40x10 smd: 1(-141.73,108.27) 2(-141.73,88.58) 3(-141.73,68.9) 4(-141.73,49.21) 5(-141.73,29.53) 6(-141.73,9.84) 7(-141.73,-9.84) 8(-141.73,-29.53) 9(-141.73,-49.21) 10(-141.73,-68.9) 11(-141.73,-88.58) 12(-141.73,-108.27) 25(141.73,-108.27) 26(141.73,-88.58) 27(141.73,-68.9) 28(141.73,-49.21) 29(141.73,-29.53) 30(141.73,-9.84) 31(141.73,9.84) 32(141.73,29.53) 33(141.73,49.21) 34(141.73,68.9) 35(141.73,88.58) 36(141.73,108.27)
  oval 10x40 smd: 13(-108.27,-141.73) 14(-88.58,-141.73) 15(-68.9,-141.73) 16(-49.21,-141.73) 17(-29.53,-141.73) 18(-9.84,-141.73) 19(9.84,-141.73) 20(29.53,-141.73) 21(49.21,-141.73) 22(68.9,-141.73) 23(88.58,-141.73) 24(108.27,-141.73) 37(108.27,141.73) 38(88.58,141.73) 39(68.9,141.73) 40(49.21,141.73) 41(29.53,141.73) 42(9.84,141.73) 43(-9.84,141.73) 44(-29.53,141.73) 45(-49.21,141.73) 46(-68.9,141.73) 47(-88.58,141.73) 48(-108.27,141.73)
  rect 190x190 smd: 49(0,0)
  silkscreen extent -184,-138 138,145
R0603-S [mm]
  rect 1.1x1 smd: 1(-0.9,0) 2(0.9,0)
  body extent -0.79,-0.39 0.74,0.38, height 0.46
R0805-S [mm]
  rect 1.2x1.4 smd: 1(-1,0) 2(1,0)
  body extent -1.02,-0.65 1.02,0.62, height 0.61
sm06b-srss-tb [mm]
  rect 2.54x3.08 smd: 0(-4.4,-1.6) 0(4.4,-1.6)
  rect 0.508x2.286 smd: 1(-2.5,1.6)
  oval 0.508x2.286 smd: 2(-1.5,1.6) 3(-0.5,1.6) 4(0.5,1.6) 5(1.5,1.6) 6(2.5,1.6)
  silkscreen extent -5.5,-3.73 5.5,-3.4, body extent -4,-2.72 4,2.23, height 2.9
SO-16 [mm]
  rect 0.6x2.2 smd: 1(-4.406,-2.588) 2(-3.136,-2.588) 3(-1.866,-2.588) 4(-0.596,-2.588) 5(0.674,-2.588) 6(1.944,-2.588) 7(3.214,-2.588) 8(4.484,-2.588) 9(4.484,2.612) 10(3.214,2.612) 11(1.944,2.612) 12(0.674,2.612) 13(-0.596,2.612) 14(-1.866,2.612) 15(-3.136,2.612) 16(-4.406,2.612)
  silkscreen extent -5.38,-2.71 5.04,1.11
SOIC8-LH [mil] "SOIC8-LH"
  rect 25x80 smd: 1(-74.5,-101.06) 2(-24.5,-101.06) 3(25.5,-101.06) 4(75.5,-101.06) 5(75.5,101.06) 6(25.5,101.06) 7(-24.5,101.06) 8(-74.5,101.06)
  rect 118.11x78.74 smd: 9(0.5,0)
  silkscreen extent -131,-121 99,79
SOT-23 [mm] "SOT-23"
  rect 1x1.2 smd: 1(0.952,1.175) 2(-0.953,1.175) 3(-0.013,-1.175)
  silkscreen extent -1.46,-0.81 1.44,0.21
SOT-223 [mm]
  rect 1.1x2.15 smd: 1(-2.3,-3.1) 2(0,-3.1) 3(2.3,-3.1)
  rect 3.5x2.15 smd: 4(0,3.1)
  silkscreen extent -3.35,-4.85 3.35,1.63, body extent -3.15,-3.3 3.15,3.3, height 1.8
SW4-SMD [mm] "SW4-SMD"
  rect 1.5x1 smd: 1(-2.75,-2) 2(2.75,-2) 3(2.75,2) 4(-2.75,2)
  silkscreen extent -3.1,-2.87 3.1,2.87
tssop8 [mm] "TSSOP8"
  oval 0.25x1.25 smd: 1(-0.75,-1.525) 2(-0.25,-1.525) 3(0.25,-1.525) 4(0.75,-1.525) 5(0.75,1.525) 6(0.25,1.525) 7(-0.25,1.525) 8(-0.75,1.525)
  silkscreen extent -1.2,-2.92 1.2,0.5
TSSOP8 [mm] "TSSOP8"
  oval 0.25x1.25 smd: 1(-0.75,-1.525) 2(-0.25,-1.525) 3(0.25,-1.525) 4(0.75,-1.525) 5(0.75,1.525) 6(0.25,1.525) 7(-0.25,1.525) 8(-0.75,1.525)
  silkscreen extent -1.2,-2.92 1.2,0.5
TSSOP56 [mm] "TSSOP56"
  oval 0.27x1.65 smd: 1(-6.75,-3.875) 2(-6.25,-3.875) 3(-5.75,-3.875) 4(-5.25,-3.875) 5(-4.75,-3.875) 6(-4.25,-3.875) 7(-3.75,-3.875) 8(-3.25,-3.875) 9(-2.75,-3.875) 10(-2.25,-3.875) 11(-1.75,-3.875) 12(-1.25,-3.875) 13(-0.75,-3.875) 14(-0.25,-3.875) 15(0.25,-3.875) 16(0.75,-3.875) 17(1.25,-3.875) 18(1.75,-3.875) 19(2.25,-3.875) 20(2.75,-3.875) 21(3.25,-3.875) 22(3.75,-3.875) 23(4.25,-3.875) 24(4.75,-3.875) 25(5.25,-3.875) 26(5.75,-3.875) 27(6.25,-3.875) 28(6.75,-3.875) 29(6.75,3.875) 30(6.25,3.875) 31(5.75,3.875) 32(5.25,3.875) 33(4.75,3.875) 34(4.25,3.875) 35(3.75,3.875) 36(3.25,3.875) 37(2.75,3.875) 38(2.25,3.875) 39(1.75,3.875) 40(1.25,3.875) 41(0.75,3.875) 42(0.25,3.875) 43(-0.25,3.875) 44(-0.75,3.875) 45(-1.25,3.875) 46(-1.75,3.875) 47(-2.25,3.875) 48(-2.75,3.875) 49(-3.25,3.875) 50(-3.75,3.875) 51(-4.25,3.875) 52(-4.75,3.875) 53(-5.25,3.875) 54(-5.75,3.875) 55(-6.25,3.875) 56(-6.75,3.875)
  silkscreen extent -7.56,-4 7.05,2.65
TSSOP_48 [mil] "TSSOP_48"
  rect 12x65 smd: 1(-226.38,-147.64) 2(-206.69,-147.64) 3(-187.01,-147.64) 4(-167.32,-147.64) 5(-147.64,-147.64) 6(-127.95,-147.64) 7(-108.27,-147.64) 8(-88.58,-147.64) 9(-68.9,-147.64) 10(-49.21,-147.64) 11(-29.53,-147.64) 12(-9.84,-147.64) 13(9.84,-147.64) 14(29.53,-147.64) 15(49.21,-147.64) 16(68.9,-147.64) 17(88.58,-147.64) 18(108.27,-147.64) 19(127.95,-147.64) 20(147.64,-147.64) 21(167.32,-147.64) 22(187.01,-147.64) 23(206.69,-147.64) 24(226.38,-147.64) 25(226.38,147.64) 26(206.69,147.64) 27(187.01,147.64) 28(167.32,147.64) 29(147.64,147.64) 30(127.95,147.64) 31(108.27,147.64) 32(88.58,147.64) 33(68.9,147.64) 34(49.21,147.64) 35(29.53,147.64) 36(9.84,147.64) 37(-9.84,147.64) 38(-29.53,147.64) 39(-49.21,147.64) 40(-68.9,147.64) 41(-88.58,147.64) 42(-108.27,147.64) 43(-127.95,147.64) 44(-147.64,147.64) 45(-167.32,147.64) 46(-187.01,147.64) 47(-206.69,147.64) 48(-226.38,147.64)
  silkscreen extent -248,-226 248,228
X4-2_5X3_2 [mil] "X4-2_5X3_2"
  oct 33.3x33.3 smd rot 3: 1(-36.54,57.68) 2(-36.54,-57.68) 3(36.54,-57.68) 4(36.54,57.68)
  silkscreen extent -80,-67 53,67

## Part data
BAT1: library part BATTERY_0
C1: library part CT2012_0
C2 C3 C26 C28 C29 C30 C31 C32 C33 C35 C38 C39 C150: library part C1608_Dup1
C4 C5 C6 C7 C45 C46 C47 C48 C51 C52 C53 C54 C55: library part "Cap Semi"
C8 C9 C10 C11 C12 C13 C14 C15 C16 C17 C18 C19 C20 C21 C24 C25 C40 C79 C80 C87 C88 C128: library part C0603_0
C22 C23 C89 C93: library part C1005
C27 C34 C118: library part C1206_0
C36 C37: library part CAP_1
C41 C42 C43 C44 C49 C50: library part CAP, "CAP"
C56 C59 C61 C62: library part C1608_Dup2
C57 C58 C60 C112 C117 C129 C130 C148 C149: library part C0402_0
C95 C96 C154: library part "CAP NP_3", "CER CHIP 1U 10% X5R 0402 10V  L/F"
D1 D2: library part DIODE
D3 D4 D5: library part LED-RED_SMD_1
F1 F2: library part FUSE
J4: library part "Header 20", "Header, 20-Pin"
J5: library part HEADER1X6
J7: library part ZX62RD-AB-5P8_3
L1 L2 L7: library part LQH32C_0
Q2 Q3 Q8: library part L14P2/TO_1
Q7: library part "MOSFET P"
R1 R2 R4 R5 R6 R7 R8 R9 R10 R11 R22 R49 R50 R51 R52 R53 R54 R55 R56 R86 R89 R105 R106 R165 R173 R174: library part R1005_0_Dup1
R3 R15 R16 R17 R18 R19 R20 R21 R24 R27 R28 R29 R32 R43 R46 R119 R120 R128 R129 R131 R133 R135: library part R1005_0
R12 R13 R14: library part Res
R23: library part R
R25 R26 R30 R31 R33 R36 R39 R40 R41 R42 R44 R45 R47: library part RESISTOR_0
R34 R35 R37 R38: library part R_Dup2
R48 R57: library part R0603_0
SW1: library part SW-4
U1: library part TVP5151
U2 U17: library part TXS0102DCU_1
U3: library part REG1117-3.3, "800mA and 1A Low Dropout Positive Regulator 2.85V, 3.3V, 5V, and Adjustable"
U4: library part MAX3232EEAE
U5: "Current Sensor"
U8: library part DM9621NP_1
U12: library part U-SN75LVDS83BDGG_3
U22: library part RT8065_3
Y1: library part Y_24.576MHZ-5032
Y2: library part XM/SM

## Free pads (board coordinates)
  round 39.37 smd: ""(383.61,3155.57) ""(3598.61,1125.57)

## Via types
v1: diameter 22, hole 12, TOP to BOTTOM, tented both sides, 177 vias
v2: diameter 22, hole 12, TOP to BOTTOM, 89 vias
v3: diameter 28, hole 16, TOP to BOTTOM, 37 vias
v4: diameter 30, hole 20, TOP to BOTTOM, tented both sides, 26 vias
v5: diameter 24, hole 12, TOP to BOTTOM, 17 vias
v6: diameter 50, hole 30, TOP to BOTTOM, tented both sides, 5 vias
v7: diameter 40, hole 24, TOP to BOTTOM, 1 vias

## Nets (pads, with @x,y where several pads share a name; then routed paths per layer and width w, separated by ;. In a path a pad name is that pad's centre, name@x,y a point inside that pad or via, vN(x,y) a via of type N, cw(c..) or ccw(c..) an arc to the next point about the centre after c; other vN are vias at no path point)
5V_IN: F1.1 J2.1 J2.2 J2.3 J2.4 | length 2948.4
  TOP w50: F1.1@142.02,3533.5 70.76,3528.74 ; F1.1@147.02,3605 70.76,3528.74 ; J2.2@161.39,988.64 J2.1@240.13,988.64 J2.3@240.13,1067.38 J2.4@161.39,1067.38 103.38,1067.38 70.76,1100 70.76,3528.74
12V: C49.2 C50.2 J3.7 J3.8 J3.9 J3.10 J5.5 J5.6 | length 2959.5
  TOP w50: C50.2@3405.13,4160.75 3405.13,4234.37 ; J5.6@3482.77,4273.43 3427.85,4257.1 ; 3490.68,4257.1 v6(3665.76,4255) 3663.66,4257.1 3427.85,4257.1 ; C50.2@3405.13,4154.84 3405.13,4088.64 3405.13,4148.94 C49.2@3405.13,4086.67 C50.2@3405.13,4154.84 ; C50.2@3405.13,4154.84 3405.13,4234.37 ; 3405.13,4234.37 3427.85,4257.1
  BOTTOM w40: J3.10@3595.13,2518.49 J3.9@3516.39,2518.49 J3.7@3516.39,2597.23 J3.8@3595.13,2597.23 3652.99,2597.23 3705.76,2650 3705.76,4225 ; 3705.76,4225 v6(3665.76,4255) 3675.76,4255 3705.76,4225
6260_GPIO1: CON10.69
6260_GPIO2: CON11.5
ACOKB_CHARGER: CON10.65 R173.1 R174.2 | length 1309.6
  TOP w6: R174.2@476.21,2480.64 516.46,2461.73 ; R174.2@479.16,2485.94 516.46,2461.73 ; R174.2@482.77,2490.76 516.46,2461.73 ; R174.2@484.05,2494.14 539.76,2438.43 539.76,2376 561.81,2353.95 CON10.65@800.66,2353.95 ; R174.2@486.02,2494.14 516.46,2461.73 ; R174.2@489.59,2497.17 516.46,2461.73 ; R174.2@494.63,2500.47 516.46,2461.73 ; R174.2@500.1,2503.08 516.46,2461.73 ; 755.16,2353.95 CON10.65@778.16,2353.95
  TOP w10: R173.1@467.4,2557.6 R174.2@472.95,2507.51 ; R174.2@469.52,2496.31 484.05,2543.83 R174.2@498.57,2496.31 ; R173.1@469.52,2554.9 484.05,2507.39 R173.1@498.57,2554.9 ; R173.1@472.12,2552.33 R174.2@495.15,2507.51 ; R173.1@482.08,2557.07 R174.2@472.95,2507.51 ; R174.2@484.05,2494.14 R173.1@484.05,2557.07 ; R173.1@486.02,2557.07 R174.2@495.15,2507.51 ; R173.1@495.98,2552.33 R174.2@472.95,2507.51 ; R173.1@500.69,2557.6 R174.2@495.15,2507.51
AGND: C4.1 C5.1 R12.1 R16.1 U1.19 | length 4210
  TOP w10: R12.1@2128.07,603.58 2176.23,574.1 ; R12.1@2135.33,615 2210.13,540.2 C5.1@2210.13,477.5 2218.1,469.53 U1.19@2323.77,469.53 ; R12.1@2137.3,615 2176.23,574.1 ; R12.1@2149.16,623.66 2176.23,574.1 ; C4.1@2197.43,544.94 C5.1@2201.19,494.53 ; C5.1@2197.53,481.16 C4.1@2210.13,527.19 ; C4.1@2198,540.48 C5.1@2219.07,494.53 ; C4.1@2199.76,545 2202.77,503.34 ; C4.1@2199.77,545.29 2200.64,501.89 ; C4.1@2200.02,543.26 2215.71,501.87 ; C4.1@2200.12,542.95 2217.27,504.53 ; C4.1@2201.02,539.34 2168.76,581.57 ; C4.1@2201.22,541.07 2173.41,577.82 ; C4.1@2201.27,541.02 2173.36,576.96 ; C4.1@2201.34,540.94 2172.08,577.23 ; v1@2201.99,245.33 2225.76,230 ; v1(2205.76,250) 2225.76,230 ; C4.1@2209.62,549.59 2172.08,577.23 ; C4.1@2209.68,549.54 2173.36,576.96 ; C4.1@2209.75,549.48 2173.41,577.82 ; C5.1@2210.13,475.53 2259.94,469.53 ; C5.1@2210.13,479.47 C4.1@2210.13,527.19 ; C4.1@2210.13,548.22 2168.76,581.57 ; C5.1@2210.22,462.82 2259.94,469.53 ; v1@2210.43,253.77 2225.76,230 ; C4.1@2211.63,546.23 2217.27,504.53 ; C4.1@2211.65,543.88 2200.64,501.89 ; C4.1@2211.68,545.95 2215.71,501.87 ; C4.1@2211.7,544.14 2202.77,503.34 ; C5.1@2213.24,487.86 2259.94,469.53 ; C4.1@2216.87,559 2168.76,581.57 ; C4.1@2222.26,540.48 C5.1@2201.19,494.53 ; C5.1@2222.73,481.16 C4.1@2210.13,527.19 ; C4.1@2222.83,544.94 C5.1@2219.07,494.53 ; 2264.24,469.53 U1.19@2299.16,469.53 ; R16.1@2410.97,81.79 2382.86,35 ; R16.1@2422.43,72.6 2382.86,35 ; R16.1@2422.43,74.57 2382.86,35 ; R16.1@2431.02,60.69 2382.86,35 ; 2172.08,577.23 v1(2205.76,545) ; 2173.36,576.96 v1(2205.76,545) ; 2173.41,577.82 v1(2205.76,545) ; C4.1@2199.85,543.95 2210.13,503.46 ; C4.1@2199.85,543.95 2210.13,503.46 ; C4.1@2199.85,543.96 2210.13,503 ; 2200.64,501.89 v1(2205.76,545) ; C5.1@2201.19,494.53 C4.1@2210.13,544.28 ; 2202.77,503.34 v1(2205.76,545) ; v1(2205.76,545) 2210.13,503.46 ; v1(2205.76,545) 2208.78,501.5 ; v1(2205.76,545) 2217.27,504.53 ; v1(2205.76,545) 2215.71,501.87 ; v1(2205.76,545) 2210.13,503.46 ; v1(2205.76,545) 2208.78,501.5 ; v1(2205.76,545) 2210.13,503 ; 2208.78,501.5 2199.82,544.17 2208.78,501.5 ; 2208.78,501.5 2211.76,545 2208.78,501.5 ; C5.1@2210.13,496.56 C4.1@2210.13,544.28 ; C5.1@2210.13,496.56 2197.53,542.59 C5.1@2210.13,496.56 ; C5.1@2210.13,496.56 2222.73,542.59 C5.1@2210.13,496.56 ; C5.1@2210.13,496.56 C4.1@2210.13,544.28 ; 2210.13,503 C4.1@2211.76,545.2 ; 2210.13,503.46 C4.1@2211.76,545.2 ; 2210.13,503.46 C4.1@2211.76,545.2 ; C4.1@2210.13,544.28 C5.1@2219.07,494.53 ; 2225.76,230 2225.76,50 2240.76,35 2382.86,35
  BOTTOM w10: v1@2199.78,250.44 2205.76,291 v1@2211.74,250.44 ; v1@2199.78,544.56 2205.76,504 v1@2211.74,544.56 ; v1@2205.76,247.5 v1(2205.76,250) v1(2205.76,545)
AP_SLEEP: CON12.67 R4.2 R55.2 | length 6040
  TOP w6: R4.2@110.19,4162.85 114.19,4162.85 v2(119.19,4157.85) ; R4.2@120.83,4150.02 R4.2@138.69,4157.85 ; R4.2@120.83,4165.68 R4.2@138.69,4157.85 ; v1(825.76,3385) 850.76,3385 ; v1@827.04,3377.1 850.76,3385 ; v1@827.04,3392.9 850.76,3385 ; v1@1064.32,3190.25 1051.76,3214 ; v1@1075.51,3201.44 1051.76,3214 ; v2@1395.83,2582.42 1403.61,2597.85 ; v2(1403.61,2580.57) 1403.61,2597.85 ; v2@1411.4,2582.42 1403.61,2597.85 ; 1601.84,2814.36 CON12.67@1601.84,2837.36 ; CON12.67@1601.84,2859.86 1601.84,2663.92 ; R55.2@3474.49,3143.9 3490.76,3109.91 ; R55.2@3480.18,3146.08 3490.76,3109.91 ; R55.2@3486.08,3147.31 3490.76,3109.91 ; R55.2@3490.76,3147.6 3490.76,3109.91 ; R55.2@3490.76,3149.57 3490.76,2958.13 3322.63,2790 2520.76,2790 2321.25,2590.49 1675.27,2590.49 1601.84,2663.92 ; R55.2@3495.44,3147.31 3490.76,3109.91 ; R55.2@3501.34,3146.08 3490.76,3109.91 ; R55.2@3507.03,3143.9 3490.76,3109.91 ; v2(119.19,4157.85) R4.2@138.69,4157.85 ; v2(119.19,4157.85) R4.2@119.76,4157.85 R4.2@138.69,4157.85 ; 850.76,3385 1021.76,3214 1051.76,3214 ; 1051.76,3214 v1(1070.76,3195) 1051.76,3214 ; 1403.61,2597.85 1469.68,2663.92 1601.84,2663.92
  BOTTOM w6: v2@114.04,4159 v2@119.19,4159 ; v1@1063.22,3192.32 1078.61,3160.96 ; v1@1078.71,3195.89 1078.61,3160.96 ; v2@1397.32,2575.63 1379.89,2604.3 ; v2@1408.56,2586.86 1379.89,2604.3 ; 1078.61,3160.96 v1(1070.76,3195) 1078.61,3187.15 1078.61,2905.57 v2(1403.61,2580.57) 1379.89,2604.3
  BOTTOM w8: v2(119.19,4157.85) 771.91,4157.85 803.61,4126.15 803.61,3407.15 ; v1@820.29,3380.63 803.61,3407.15 ; v1(825.76,3385) 803.61,3407.15 ; v1@830.13,3390.47 803.61,3407.15
AP_WAKEUP_MD: CON12.68
AV1_IN: C17.1 J1.4 J3.35 J3.36 L1.1 R13.1 R14.2 | length 5268.4
  TOP w15: R13.1@3366.19,287.6 3368.16,285.63 C17.1@3435.76,285.63 3439.7,289.57 R14.2@3505.76,289.57 ; R13.1@3368.16,287.6 C17.1@3432.89,285.63 ; R13.1@3368.94,275.44 C17.1@3432.89,285.63 ; R13.1@3369.68,299.69 C17.1@3432.89,285.63 ; C17.1@3430.81,275.86 R13.1@3372.05,299.16 ; C17.1@3431.39,295.56 R13.1@3371.58,275.86 ; C17.1@3432.65,275.48 R13.1@3371.09,287.51 ; C17.1@3432.96,275.45 R13.1@3371.07,285.63 ; C17.1@3432.96,295.81 R13.1@3371.07,285.63 ; C17.1@3433.26,295.83 R13.1@3371.09,287.51 ; C17.1@3434.55,275.44 R13.1@3371.58,275.86 ; C17.1@3435.16,295.75 R13.1@3372.05,299.16 ; C17.1@3436.11,295.72 R14.2@3499.41,300.7 ; C17.1@3437.35,275.42 R14.2@3500.68,278.19 ; C17.1@3437.92,295.84 R14.2@3500.7,289.57 ; C17.1@3439.19,275.52 R14.2@3500.7,289.57 ; C17.1@3439.74,295.65 R14.2@3500.68,278.19 ; C17.1@3440.94,275.93 R14.2@3499.41,300.7 ; L1.1@3445.13,197.42 3470.56,254.37 ; L1.1@3459.61,192.97 3470.56,254.37 ; L1.1@3470.56,145 3470.56,254.37 ; L1.1@3470.56,192 3470.56,254.37 ; L1.1@3481.52,192.97 3470.56,254.37 ; L1.1@3495.99,197.42 3470.56,254.37 ; R14.2@3496.35,295.34 3470.56,254.37 ; R14.2@3504.61,277.44 3441.07,289.57 R14.2@3504.61,301.7 ; R14.2@3505.76,287.6 3470.56,254.37 ; R14.2@3506.91,277.44 3570.45,289.57 R14.2@3506.91,301.7 ; R14.2@3512.94,277.76 3470.56,254.37 ; J1.4@3622.75,336.41 3598.44,289.57 ; J1.4@3635.76,326.89 3598.44,289.57 ; J1.4@3645.29,313.88 3598.44,289.57 ; R13.1@3371.07,285.63 C17.1@3433.79,285.63 ; R13.1@3371.09,287.51 C17.1@3433.79,285.63 ; R13.1@3371.58,275.86 C17.1@3433.79,285.63 ; R13.1@3372.05,299.16 C17.1@3433.79,285.63 ; C17.1@3437.73,285.63 R14.2@3500.68,278.19 ; C17.1@3437.73,285.63 R14.2@3499.41,300.7 ; C17.1@3437.73,285.63 R14.2@3500.7,289.57 ; 3470.56,254.37 R14.2@3505.76,289.57 ; R14.2@3505.76,289.57 3598.44,289.57
  BOTTOM w15: J3.35@3508.72,1509.05 3480.27,1484.51 ; J3.35@3517.41,1478.78 3480.27,1484.51 ; J3.35@3518.28,1478.86 3585.01,1494.87 J3.35@3518.28,1510.88 ; J3.36@3590.09,1479.55 J3.35@3527.28,1508.72 ; J3.36@3590.09,1510.18 J3.35@3527.28,1481.02 ; J3.36@3593.24,1478.86 3526.51,1494.87 J3.36@3593.24,1510.88 ; J3.36@3596.49,1478.8 J3.35@3527.28,1481.02 ; J3.36@3596.49,1510.93 J3.35@3527.28,1508.72 ; J1.4@3633.87,310.88 3567.14,326.89 J1.4@3633.87,342.9 ; J1.4@3635.76,326.89 3513.87,326.89 3480.27,360.49 3480.27,1484.51 ; 3480.27,1484.51 J3.35@3516.39,1494.87 ; 3480.27,1484.51 3490.63,1494.87 ; 3490.63,1494.87 3511.35,1510.18 3490.63,1494.87 ; 3490.63,1494.87 3511.35,1479.56 3490.63,1494.87 ; 3490.63,1494.87 J3.35@3516.39,1494.87 ; 3490.63,1494.87 J3.35@3516.39,1494.87 ; J3.35@3516.39,1494.87 J3.36@3595.13,1494.87 ; J3.35@3527.28,1481.02 J3.36@3595.13,1494.87 ; J3.35@3527.28,1508.72 J3.36@3595.13,1494.87
AV2_IN: C20.1 J1.2 J3.39 J3.40 L2.1 R19.2 R32.1 | length 3250.6
  TOP w20: R19.2@3366.19,497.4 R19.2@3368.16,499.37 ; L2.1@3447.54,588.31 3470.56,534.17 ; L2.1@3470.56,593 3470.56,534.17 ; L2.1@3470.56,640 3470.56,534.17 ; L2.1@3493.59,588.31 3470.56,534.17 ; 3585.45,495 R32.1@3505.76,495.43 ; J1.2@3633.04,471.02 3549.5,495 ; J1.2@3636.36,497.98 3549.5,495 ; R19.2@3368.16,499.37 3433.79,499.37 3368.16,497.4 C20.1@3435.76,499.37 ; R19.2@3368.16,499.37 C20.1@3435.76,499.37 ; C20.1@3435.76,499.37 3470.56,534.17 ; C20.1@3435.76,499.37 3439.7,495.43 R32.1@3505.76,495.43 ; 3470.56,534.17 3437.73,499.37 R32.1@3505.76,495.43 ; R32.1@3505.76,495.43 3506.19,495 3625.13,495 J1.2@3635.76,484.37 3549.5,495
  BOTTOM w20: J3.39@3502.81,1336.28 3516.39,1253.77 ; J3.39@3516.39,1321.97 3516.39,549.37 3581.39,484.37 ; J3.39@3529.97,1336.28 3516.39,1253.77 ; J3.40@3591.63,1324.22 J3.39@3517.57,1350.96 ; J3.40@3591.63,1350.55 J3.39@3517.57,1323.82 ; J3.40@3593.95,1323.82 J3.39@3516.39,1337.39 ; J3.40@3593.95,1350.96 J3.39@3516.39,1337.39 ; J3.40@3596.31,1323.82 J3.39@3517.57,1323.82 ; J3.40@3596.31,1350.96 J3.39@3517.57,1350.96 ; J1.2@3634.05,470.86 3581.39,484.37 ; J1.2@3634.05,497.88 3581.39,484.37 ; J1.2@3635.76,484.37 3581.39,484.37 ; 3516.39,1253.77 J3.39@3516.39,1337.39 ; J3.39@3516.39,1337.39 J3.40@3595.13,1337.39 ; J3.39@3517.57,1323.82 J3.40@3595.13,1337.39 ; J3.39@3517.57,1350.96 J3.40@3595.13,1337.39
BGF_INT: CON13.24
BK_LED: CON12.52
BT_RST: CON10.34
BUF_GPC1_1: U9.11
BUF_GPS_RST: U9.3
BUF_GPS_RXD: R21.1 U9.12 | length 5146
  TOP w8: v1@1260.47,3783.01 1296.78,3785 ; v1@1260.76,3785 1610.76,3785 1683.45,3857.69 U9.12@1683.45,3945.28 ; v1(1260.76,3790) 1296.78,3785 ; v1@1262.39,3796.81 1296.78,3785 ; 1683.45,3888.78 U9.12@1683.45,3918.78
  TOP w10: v1@1405.02,2481.75 1401.76,2460.8 ; v1@1415.78,2476.71 1401.76,2460.8 ; R21.1@1961.24,789.57 1975.76,837.09 ; R21.1@1975.76,785.43 1975.76,845 1916.76,904 1431.76,904 1297.76,1038 1297.76,1608.06 1401.76,1712.06 1401.76,2460.8 ; R21.1@1975.76,787.4 1975.76,837.09 ; R21.1@1990.28,789.57 1975.76,837.09 ; 1401.76,2460.8 v1(1410.76,2480) 1410.76,2469.8 1401.76,2460.8
  BOTTOM w10: v1@1254.78,3790.44 1260.76,3831 v1@1266.74,3790.44 ; v1(1260.76,3790) 1260.76,3845 1244.76,3861 1196.76,3861 1140.76,3805 1140.76,3804.8 1113.26,3777.3 1113.26,3312.5 1035.53,3234.77 1035.53,2855.23 v1(1410.76,2480) 1378.55,2512.21 ; v1@1406.25,2476.05 1378.55,2512.21 ; v1@1414.71,2484.51 1378.55,2512.21
BUF_GPS_TXD: R20.1 U9.16 | length 4932.1
  TOP w8: v1@1216.69,3834.3 1235.76,3825 ; v1(1220.76,3840) 1235.76,3825 ; v1@1226.46,3844.07 1235.76,3825 ; v1(1445.76,2485) 1415.76,2455 1415.76,1706.26 1311.76,1602.26 1311.76,1044 1437.76,918 1977.76,918 2040.76,855 R20.1@2040.76,785.43 ; U9.16@1604.71,3918.78 1604.71,3891.02 ; U9.16@1604.71,3945.28 1604.71,3891.02 ; R20.1@2025.33,790.22 2040.76,831.09 ; R20.1@2033.1,788.08 2040.76,831.09 ; R20.1@2040.76,787.4 2040.76,831.09 ; R20.1@2048.42,788.08 2040.76,831.09 ; R20.1@2056.19,790.22 2040.76,831.09 ; 1235.76,3825 1538.69,3825 1604.71,3891.02
  BOTTOM w8: v1@1219.78,3833.07 1195.76,3840 ; v1@1219.78,3846.93 1195.76,3840 ; v1@1440.39,2480.51 1417.79,2512.97 ; v1@1450.25,2490.37 1417.79,2512.97 ; 1195.76,3840 v1(1220.76,3840) 1195.76,3840 ; 1195.76,3840 1127.26,3771.5 1127.26,3306.7 1049.53,3228.97 1049.53,2881.23 v1(1445.76,2485) 1417.79,2512.97
BUF_I2C_SCL6: U9.9
BUF_I2C_SDA6: U9.17
BUF_PWRDN_VCM: R40.2 U9.6 | length 4809.9
  TOP w6: R40.2@1022.35,887.06 1063.71,903.42 ; R40.2@1024.97,881.58 1063.71,903.42 ; R40.2@1028.27,876.55 1063.71,903.42 ; R40.2@1031.29,871 1225.76,1065.47 1225.76,1555 v1(1215.76,1565) ; R40.2@1031.29,872.97 1063.71,903.42 ; R40.2@1034.68,869.73 1063.71,903.42 ; R40.2@1039.49,866.12 1063.71,903.42 ; R40.2@1044.8,863.17 1063.71,903.42 ; v1@1239.54,3747.91 1272.83,3749 ; v1@1243.83,3732.61 1272.83,3749 ; v2@1330.82,1756.29 1359.49,1773.73 v2@1342.05,1745.06 ; v2(1335.76,1750) 1365.76,1780 1365.76,2607.72 v2(1428.61,2670.57) 1404.89,2646.84 ; v2@1422.32,2675.51 1404.89,2646.84 ; v2@1433.56,2664.28 1404.89,2646.84 ; 1801.56,3894.78 U9.6@1801.56,3918.78 ; U9.6@1801.56,3945.28 1801.56,3870.8 1679.76,3749 1249.76,3749 v1(1240.76,3740) 1272.83,3749
  BOTTOM w6: v1(1215.76,1565) 1310.76,1565 1335.76,1590 v2(1335.76,1750) ; v1@1216.86,1557.08 1244.76,1565 v1@1216.86,1572.92 ; v1(1240.76,3740) 1180.76,3740 1161.26,3720.5 1161.26,3292.62 1143.76,3275.12 1143.76,3089.87 1131.76,3077.87 1131.76,2967.42 v2(1428.61,2670.57) 1404.89,2694.3 ; v2@1327.84,1748.9 1335.76,1721 v2@1343.68,1748.9 ; v2@1422.32,2665.63 1404.89,2694.3 ; v2@1433.56,2676.86 1404.89,2694.3
BUF_TP_IOCTL: R26.2 U9.2 | length 292.9
  TOP w10: R26.2@1848.9,4077.95 1880.3,4065.02 ; R26.2@1855.33,4090 1880.3,4065.02 ; R26.2@1857.3,4090 1880.3,4065.02 ; R26.2@1869.99,4097.38 1880.3,4065.02 ; U9.2@1880.3,3945.28 1880.3,4065.02 ; U9.2@1880.3,3971.78 1880.3,4007.78
BUF_XPWMTOUT1: C150.1 U9.5 | length 376.9
  TOP w10: U9.5@1821.26,3945.28 1821.26,4119.87 ; U9.5@1821.26,3971.78 1821.26,4007.78 ; C150.1@1841.38,4155.87 1821.26,4119.87 ; C150.1@1851.39,4148.03 1821.26,4119.87 ; C150.1@1851.39,4150 1821.26,4119.87 ; C150.1@1858.54,4137.51 1821.26,4119.87
BUF_XURXD1: U9.20
BUF_XURXD2/UART_AUDIO_RXD: U4.12 U9.13 | length 4935.3
  TOP w6: v1(1215.76,3810) 1605.76,3810 1663.77,3868.01 U9.13@1663.77,3945.28 ; v2@1440.82,2593.76 1448.61,2577.85 ; v2@1456.41,2593.76 1448.61,2577.85 ; 1663.77,3894.78 U9.13@1663.77,3918.78 ; U4.12@1888,603.47 1896.72,631.98 ; U4.12@1896.72,570.67 1896.72,849.04 1865.76,880 1421.82,880 1273.76,1028.06 1273.76,1618 1376.76,1721 1376.76,2506 1448.61,2577.85 ; U4.12@1896.72,602.17 1896.72,631.98 ; U4.12@1905.43,603.47 1896.72,631.98 ; 1448.61,2577.85 v2(1448.61,2595.57) 1448.61,2577.85
  BOTTOM w6: v1@1214.66,3802.08 1186.76,3810 ; v1@1214.66,3817.92 1186.76,3810 ; v2@1442.32,2590.63 1424.89,2619.3 ; v2@1453.56,2601.86 1424.89,2619.3 ; 1186.76,3810 v1(1215.76,3810) 1185.76,3810 1139.26,3763.5 1139.26,3301.73 1109.76,3272.23 1109.76,2934.42 v2(1448.61,2595.57) 1424.89,2619.3
BUF_XUTXD2/UART_AUDIO_TXD: U4.11 U9.8 | length 5036.1
  TOP w6: v1(1215.76,3760) 1630.97,3760 1762.19,3891.22 U9.8@1762.19,3945.28 ; v2@1465.69,2614.47 1473.61,2586.57 ; v2@1481.54,2614.47 1473.61,2586.57 ; 1762.19,3894.78 U9.8@1762.19,3918.78 ; U4.11@1938,603.47 1946.72,631.98 ; U4.11@1946.72,570.67 1946.72,834.04 1889.76,891 1426.38,891 1284.76,1032.62 1284.76,1613.44 1388.61,1717.3 1388.61,2492.85 1473.61,2577.85 v2(1473.61,2615.57) 1473.61,2586.57 ; U4.11@1946.72,602.17 1946.72,631.98 ; U4.11@1955.43,603.47 1946.72,631.98
  BOTTOM w6: v1@1214.66,3752.08 1186.76,3760 ; v1@1214.66,3767.92 1186.76,3760 ; v2@1466.89,2611.23 1460.18,2629.01 ; v2@1477.95,2622.29 1460.18,2629.01 ; 1186.76,3760 v1(1215.76,3760) 1170.76,3760 1150.26,3739.5 1150.26,3297.17 1132.76,3279.67 1132.76,3094.43 1120.76,3082.43 1120.76,2948.42 1440.18,2629.01 1460.18,2629.01 ; 1460.18,2629.01 v2(1473.61,2615.57) 1460.18,2629.01
CAM2M_PWDN: CON11.46 U1.28 | length 3832.5
  TOP w6: U1.28@2451.72,302.2 2451.72,339.04 ; U1.28@2451.72,326.81 2451.72,339.04 ; CON11.46@2816.4,2058.69 2851.73,2058.69 ; CON11.46@2838.9,2058.69 2851.73,2058.69 ; v2@2872.32,2090.51 2854.89,2061.84 ; v2@2883.56,2079.28 2854.89,2061.84 ; v1@3168.95,2069.2 3155.4,2039.64 ; v1@3181.33,2059.26 3155.4,2039.64 ; 2451.72,339.04 2440.76,350 2374.39,350 2314.75,290.36 2308.39,284 2120.14,284 2089.76,314.38 2089.76,660.62 2368.14,939 3044.9,939 3153.65,1047.75 3153.65,2037.89 3175.76,2060 v1(3175.76,2065) 3155.4,2039.64 ; 2851.73,2058.69 v2(2878.61,2085.57) 2854.89,2061.84
  BOTTOM w6: v2@2873.67,2091.86 2902.34,2109.3 v2@2884.9,2080.63 ; v2(2878.61,2085.57) 2937.04,2144 3084.33,2144 3163.33,2065 ; 3163.33,2065 v1(3175.76,2065) ; 3163.33,2065 3173.18,2072.57 3163.33,2065 ; 3163.33,2065 3173.18,2057.43 3163.33,2065 ; 3163.33,2065 v1(3175.76,2065) ; 3163.33,2065 v1(3175.76,2065)
CAM2M_RST: CON11.44 U1.8 | length 3133.6
  TOP w6: CON11.44@2816.4,2078.36 2843.12,2078.36 2863.61,2098.86 ; CON11.44@2838.9,2078.36 2863.61,2098.86 ; v2@2855.85,2113.66 2863.61,2098.86 ; v2@2871.38,2113.66 2863.61,2098.86 ; 2863.61,2098.86 v2(2863.61,2115.57) 2863.61,2098.86
  TOP w10: U1.8@2599.36,508.9 2651.59,508.9 ; U1.8@2623.97,508.9 2651.59,508.9 ; v1@3384.78,2044.56 3390.76,2004 ; v1@3396.74,2044.56 3390.76,2004 ; 2651.59,508.9 2705.76,563.07 2705.76,750 2735.76,780 3110.76,780 3315.76,985 3315.76,1825 3390.76,1900 v1(3390.76,2045) 3390.76,2004
  BOTTOM w6: v2@2858.67,2121.86 2887.34,2139.3 v2@2869.9,2110.63 ; v2(2863.61,2115.57) 2903.04,2155 3088.89,2155 3159.89,2084 3206.76,2084 3245.76,2045 v1(3390.76,2045) ; v1@3389.66,2037.08 3361.76,2045 v1@3389.66,2052.92
CAM5M_PWDN: CON11.48
CAM5M_RST: CON11.41
CAM_D0: CON11.30 U1.18 | length 3506.3
  TOP w6: U1.18@2299.16,489.21 2281.55,489.21 ; U1.18@2323.77,489.21 2281.55,489.21 ; v1@3208.61,1978.58 3196.77,1946.01 ; v1@3221.9,1969.87 3196.77,1946.01 ; 2281.55,489.21 2265.76,505 2265.76,670 2280.76,685 2280.76,820.5 2377.26,917 3054.01,917 3175.65,1038.64 3175.65,1924.89 3215.76,1965 v1(3215.76,1975) 3196.77,1946.01
  TOP w8: v2@2696.8,2223.9 2714.27,2216.17 ; v2(2700.76,2229.67) 2714.27,2216.17 ; v2@2706.53,2233.63 2714.27,2216.17 ; 2764.9,2216.17 CON11.30@2793.9,2216.17 ; CON11.30@2816.4,2216.17 2714.27,2216.17
  BOTTOM w6: v2@2696.49,2222.91 2713.61,2216.82 ; v2(2700.76,2229.67) 2713.61,2216.82 ; v2@2707.52,2233.95 2713.61,2216.82 ; v1@3209.26,1970.34 3193.63,1999 ; v1@3220.93,1981.1 3193.63,1999 ; 2713.61,2216.82 2713.61,2132.15 2815.19,2030.57 2923.61,2030.57 3003.61,2110.57 3058.58,2110.57 3170.15,1999 3193.63,1999 ; 3193.63,1999 v1(3215.76,1975) 3215.76,1976.87 3193.63,1999
CAM_D1: CON11.29 U1.17 | length 3058.3
  TOP w6: U1.17@2323.77,508.9 2291.76,540.91 2291.76,815.95 2381.81,906 3058.57,906 3186.65,1034.08 3186.65,1905.89 3234.76,1954 3234.76,2091 3220.76,2105 ; v1(3200.76,2105) 3220.76,2105 ; v1@3202.36,2097.16 3220.76,2105 ; v1@3202.36,2112.84 3220.76,2105
  TOP w8: CON11.29@2934.52,2216.17 3185.76,2216.17 3186.07,2216.47 3292.29,2216.47 v1@3293.29,2217.47 ; CON11.29@2957.02,2216.17 2986.02,2216.17
  BOTTOM w6: v1(3200.76,2105) 3190.76,2115 3190.76,2195 3211.23,2215.47 3295.29,2215.47 v1(3295.76,2215)
CAM_D2: CON11.32 U1.16 | length 3479.5
  TOP w6: v2@2685.15,2197.98 2717.69,2196.47 ; v2@2688.3,2182.41 2717.69,2196.47 ; 2770.9,2196.47 CON11.32@2793.9,2196.47 ; CON11.32@2816.4,2196.47 2692.23,2196.47 v2(2685.76,2190) 2717.69,2196.47
  TOP w8: U1.16@2392.67,577.79 2392.67,628.09 ; U1.16@2392.67,602.4 2392.67,628.09 ; v1@3215.29,1914.36 3198.65,1887.89 ; v1@3225.12,1904.53 3198.65,1887.89 ; 2392.67,628.09 2370.76,650 2350.76,650 2305.76,695 2305.76,808.54 2391.22,894 3063.54,894 3198.65,1029.11 3198.65,1887.89 ; 3198.65,1887.89 v1(3220.76,1910) 3198.65,1887.89
  BOTTOM w6: v2@2677.98,2188.16 2688.61,2160.6 ; v2@2693.75,2189.69 2688.61,2160.6 ; v1@3215.61,1903.88 3190.74,1930.02 ; v1@3224.43,1917.11 3190.74,1930.02 ; 2688.61,2160.6 v2(2685.76,2190) 2688.61,2187.15 2688.61,2077.15 2765.19,2000.57 2948.61,2000.57 2998.04,2050 3070.76,2050 3210.76,1910 v1(3220.76,1910) 3190.74,1930.02
CAM_D3: CON11.31 U1.15 | length 3469
  TOP w8: U1.15@2412.35,577.79 2412.35,638.41 2385.76,665 2360.76,665 2320.76,705 2320.76,805.15 2396.61,881 3068.92,881 3211.65,1023.73 3211.65,1865.89 3250.76,1905 3250.76,2063.38 3275.76,2088.38 v1(3275.76,2150) ; U1.15@2412.35,602.4 2412.35,631.32 ; CON11.31@2934.52,2196.47 2934.83,2196.17 3270.45,2196.17 v1(3270.76,2196.47) 3235.76,2196.17 ; CON11.31@2957.02,2196.47 2986.02,2196.17 ; v1@3270,2203.43 3235.76,2196.17 ; v1@3270.12,2189.5 3235.76,2196.17
  BOTTOM w8: v1@3263.95,2194.84 v1@3275.76,2160.74 ; v1@3268.76,2150 v1@3272.27,2185.71 ; v1@3268.83,2148.99 3266.96,2186.16 ; v1@3268.8,2150.7 3275.76,2185 v1@3282.72,2150.7 ; v1@3268.83,2150.96 3277.12,2185.24 ; v1(3270.76,2196.47) v1@3275.76,2160.74 ; v1@3270.76,2200 3275.76,2195 v1(3275.76,2150) ; v1@3277.75,2196.77 v1@3275.76,2160.74 ; v1@3282.38,2152.29 3266.96,2186.16 ; v1@3282.63,2151.36 v1@3272.27,2185.71 ; v1@3282.75,2150.43 3277.12,2185.24 ; 3266.96,2186.16 v1(3275.76,2150) ; v1@3272.27,2185.71 v1(3275.76,2150) ; v1(3275.76,2150) 3277.12,2185.24
CAM_D4: CON11.34 U1.14 | length 3423.8
  TOP w6: v2@2740.93,2181.42 2770.1,2176.8 ; v2@2742.74,2165.67 2770.1,2176.8 ; 2770.9,2176.8 CON11.34@2793.9,2176.8 ; CON11.34@2816.4,2176.8 2739.84,2176.8 2738.61,2175.57 v2(2740.76,2173.42) 2770.1,2176.8
  TOP w8: U1.14@2432.04,577.79 2432.04,653.72 2405.76,680 2365.99,680 2336.76,709.23 2336.76,802.77 2401.99,868 3074.31,868 3224.65,1018.34 3224.65,1858.34 3275.76,1909.45 3275.76,1940 ; U1.14@2432.04,602.4 2432.04,631.32 ; v1@3263.96,1948.36 3275.76,1914.41 ; v1(3270.76,1950) 3275.76,1914.41 ; v1@3277.75,1950.29 3275.76,1914.41
  BOTTOM w6: v2@2732.78,2172.91 2738.61,2144.32 ; v2@2748.58,2171.75 2738.61,2144.32 ; v1@3262.84,1951.1 3270.76,1979 v1@3278.68,1951.1 ; v1(3270.76,1950) 3270.76,1985 3240.76,2015 3182.22,2015 3075.22,2122 2990.04,2122 2913.61,2045.57 2820.19,2045.57 2738.61,2127.15 2738.61,2175.57 v2(2740.76,2173.42) 2738.61,2144.32
CAM_D5: CON11.33 U1.13 | length 2866.3
  TOP w8: U1.13@2451.72,577.79 2451.72,664.04 2422.76,693 2371.38,693 2349.76,714.62 2349.76,797.38 2407.38,855 3079.69,855 3237.65,1012.96 3237.65,1852.96 3295.76,1911.07 3295.76,2160 3279.29,2176.47 2934.85,2176.47 CON11.33@2934.52,2176.8 ; U1.13@2451.72,602.4 2451.72,631.32 ; CON11.33@2957.02,2176.8 2986.02,2176.47